# Altium PCB demo_dermis_main_testboard_scratch.PcbDoc (part 1 of 7)
Units mm, origin at the board's own origin, x right, y up, seen from the top; angles counter-clockwise.
Board outline 348.67 x 247.5 mm, 4 copper layers (Top Layer, Layer 1, Layer 2, Bottom Layer), stack 0.603 mm thick; 416 components, 288 nets, 1934 pads, 1690 vias.
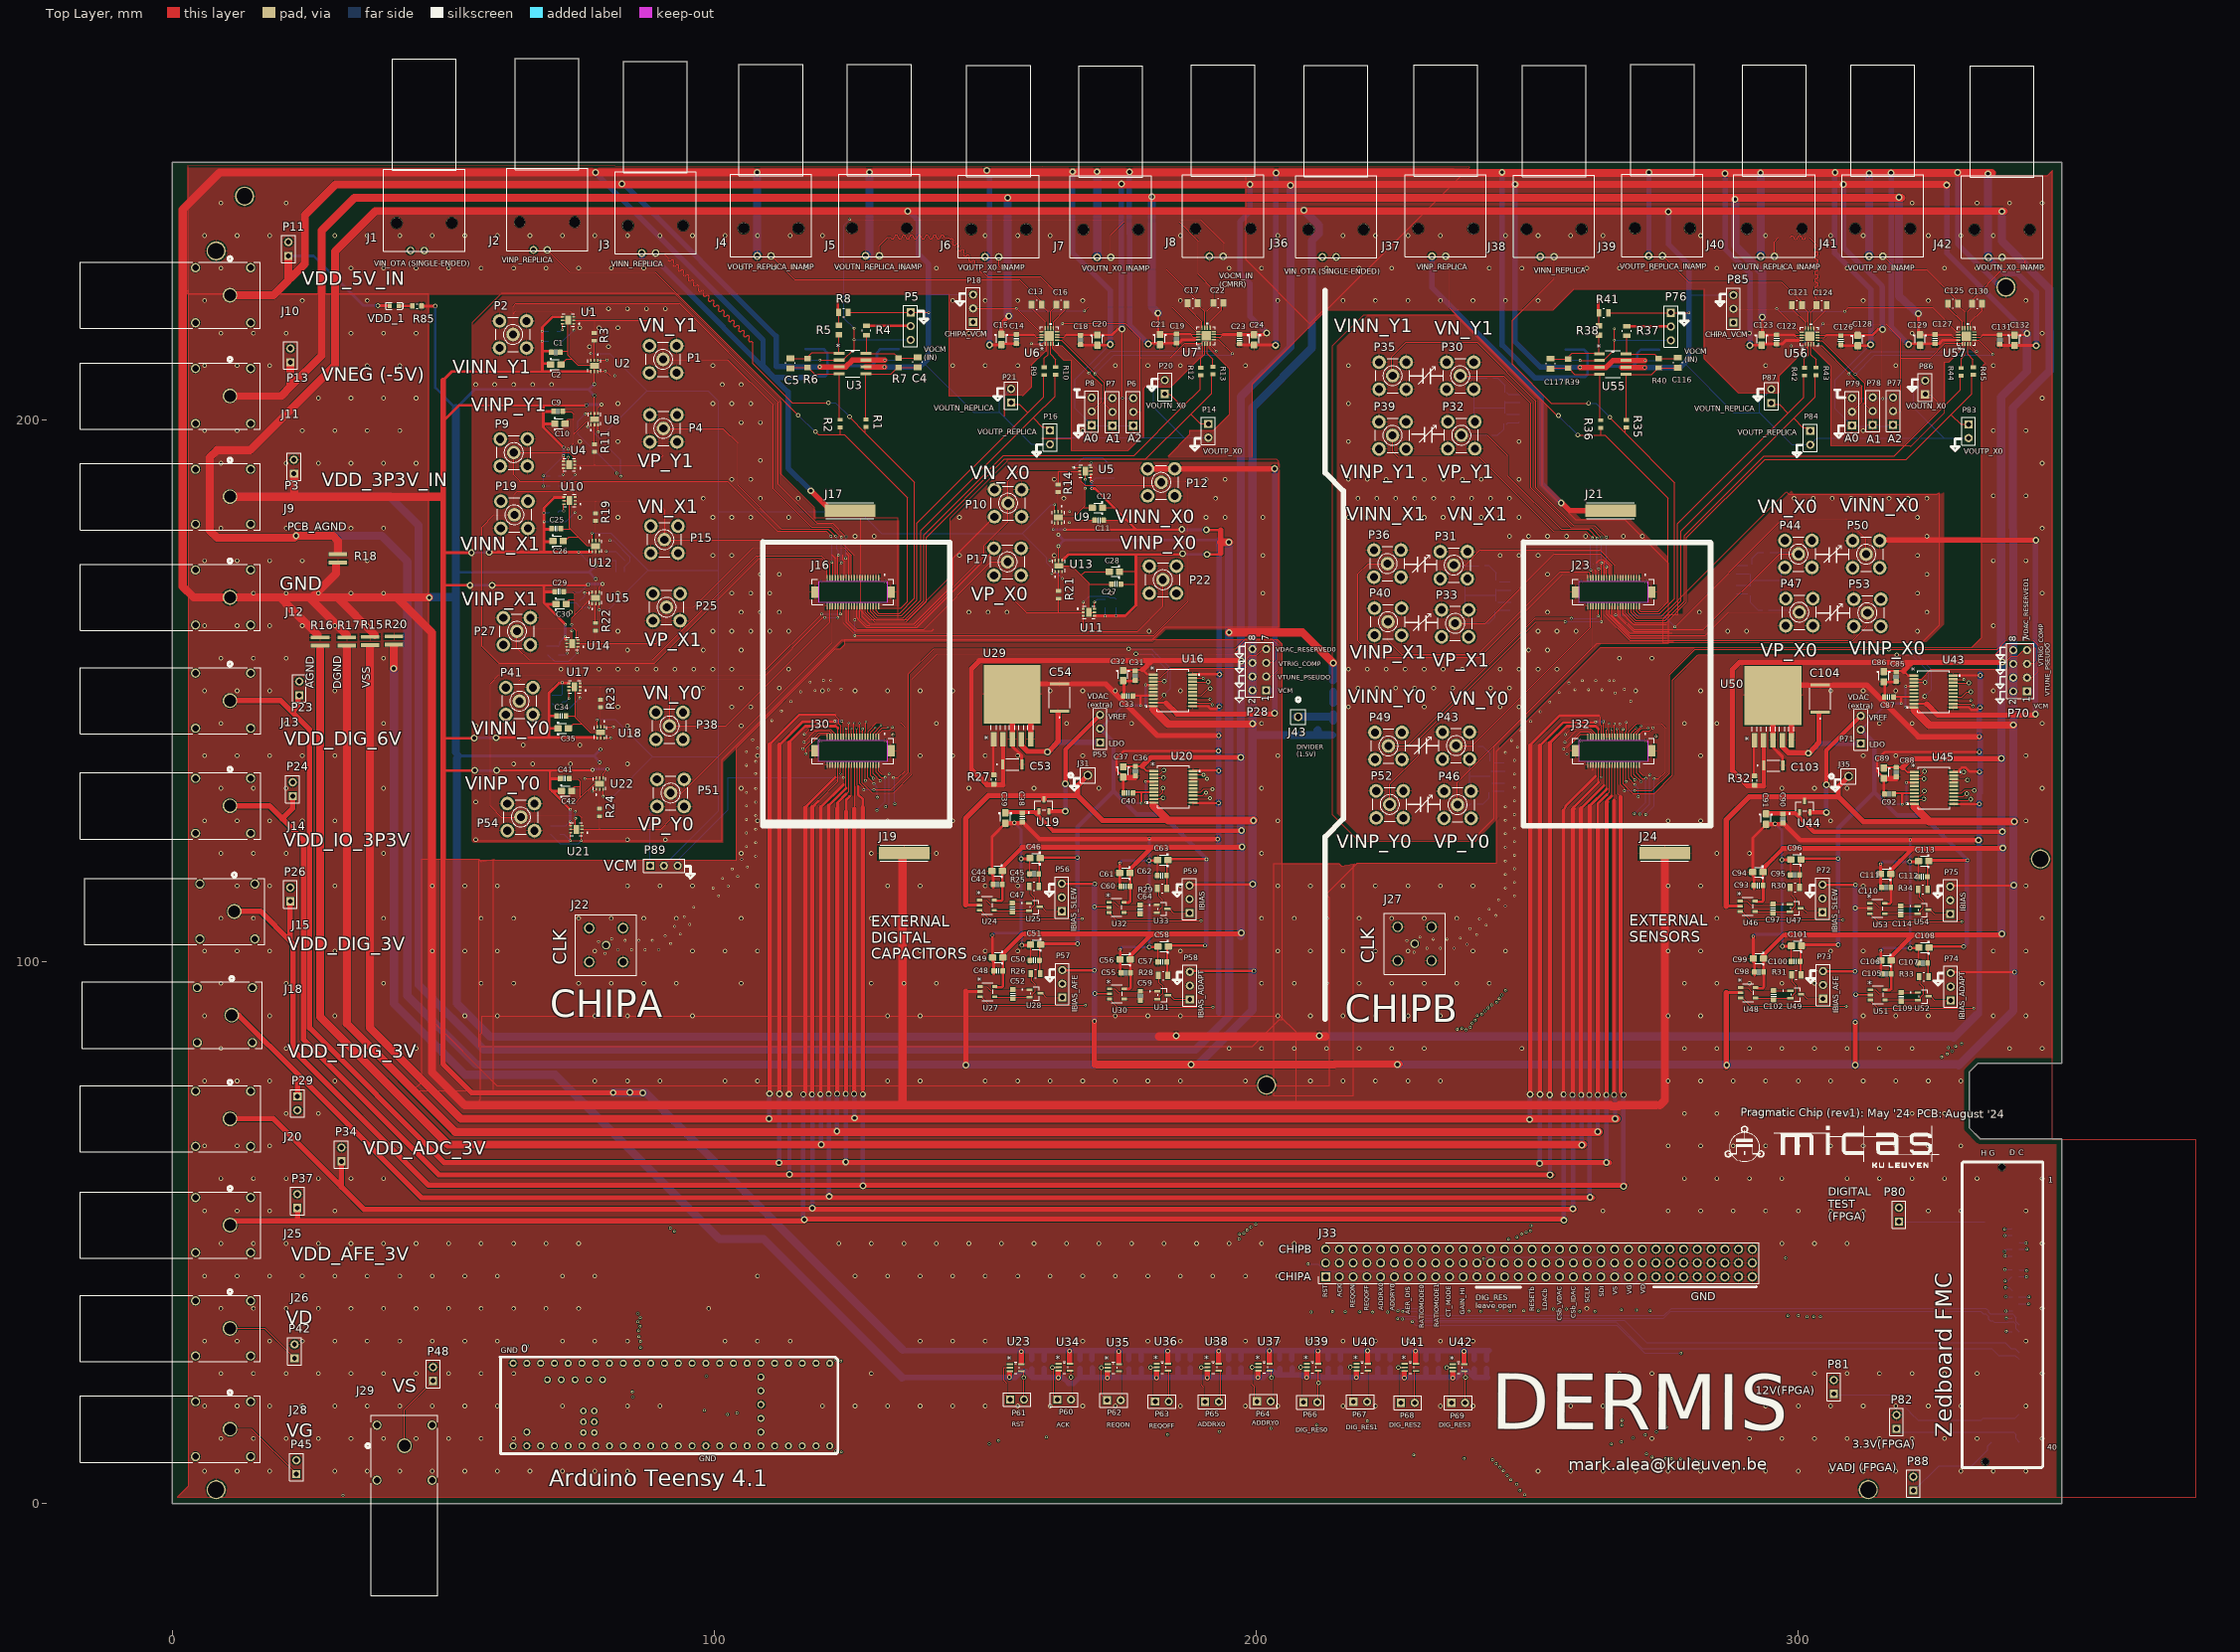
[diagram p0: Top Layer view]
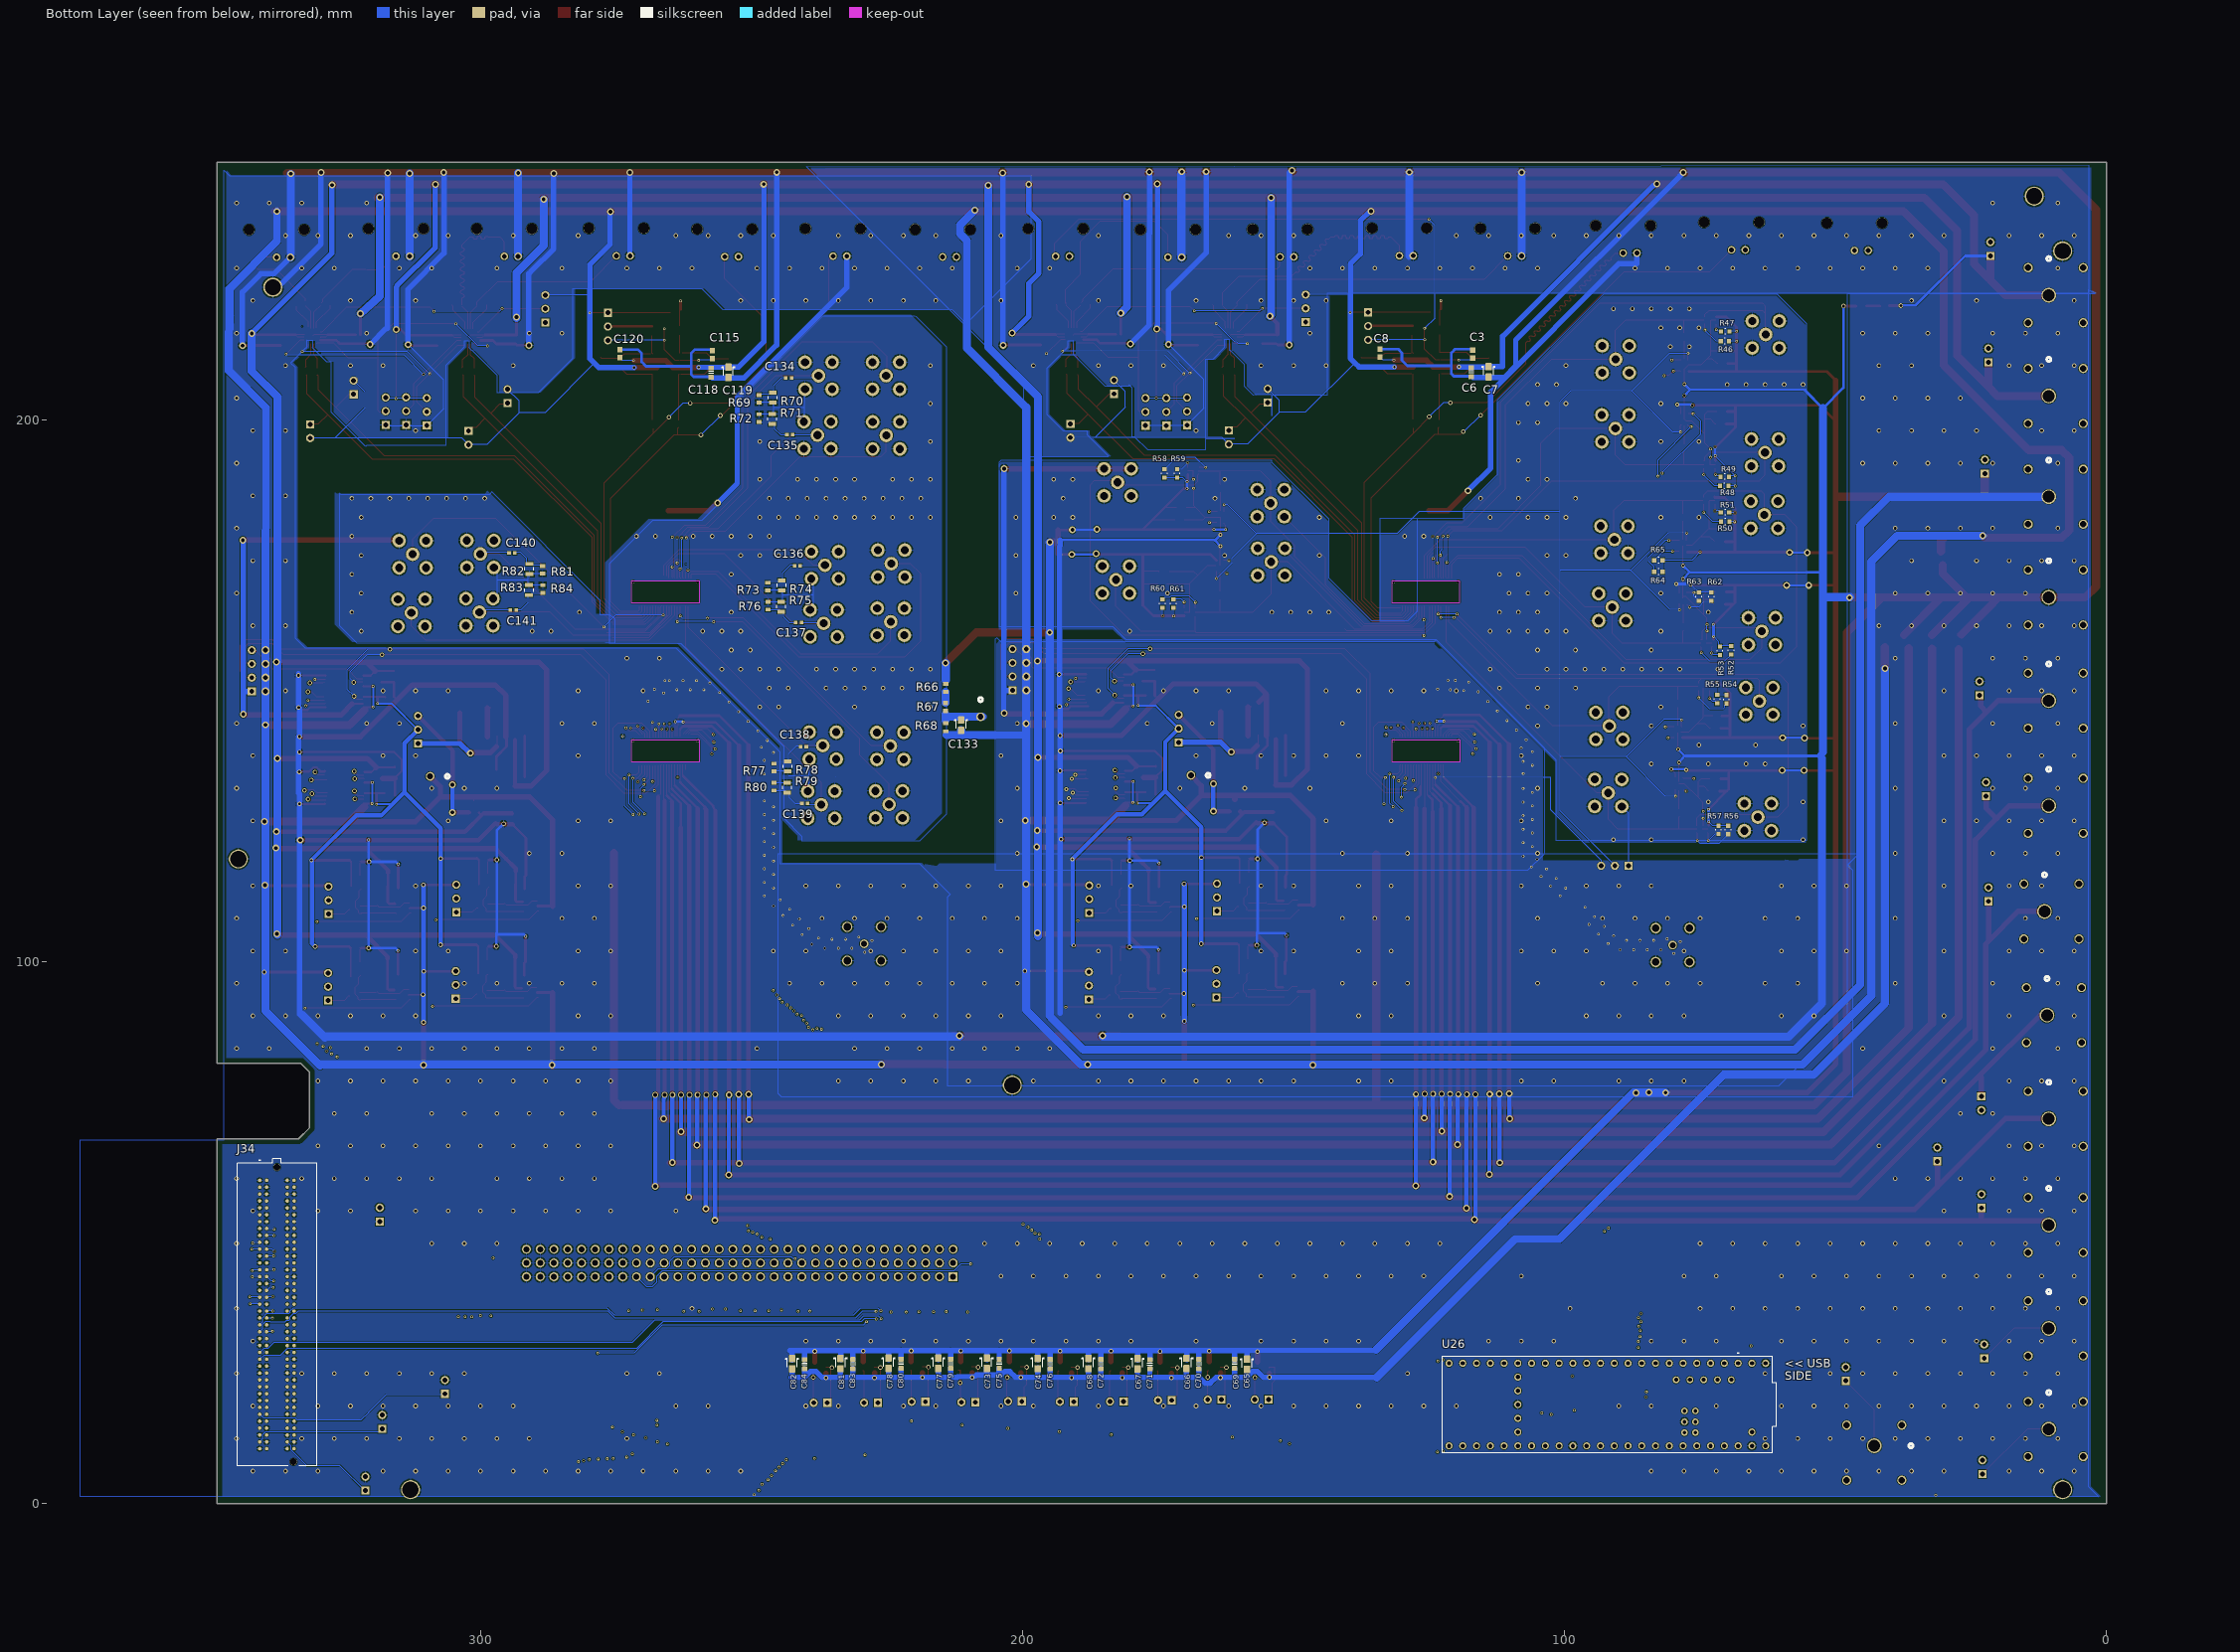
[diagram p1: Bottom Layer view, seen from below]
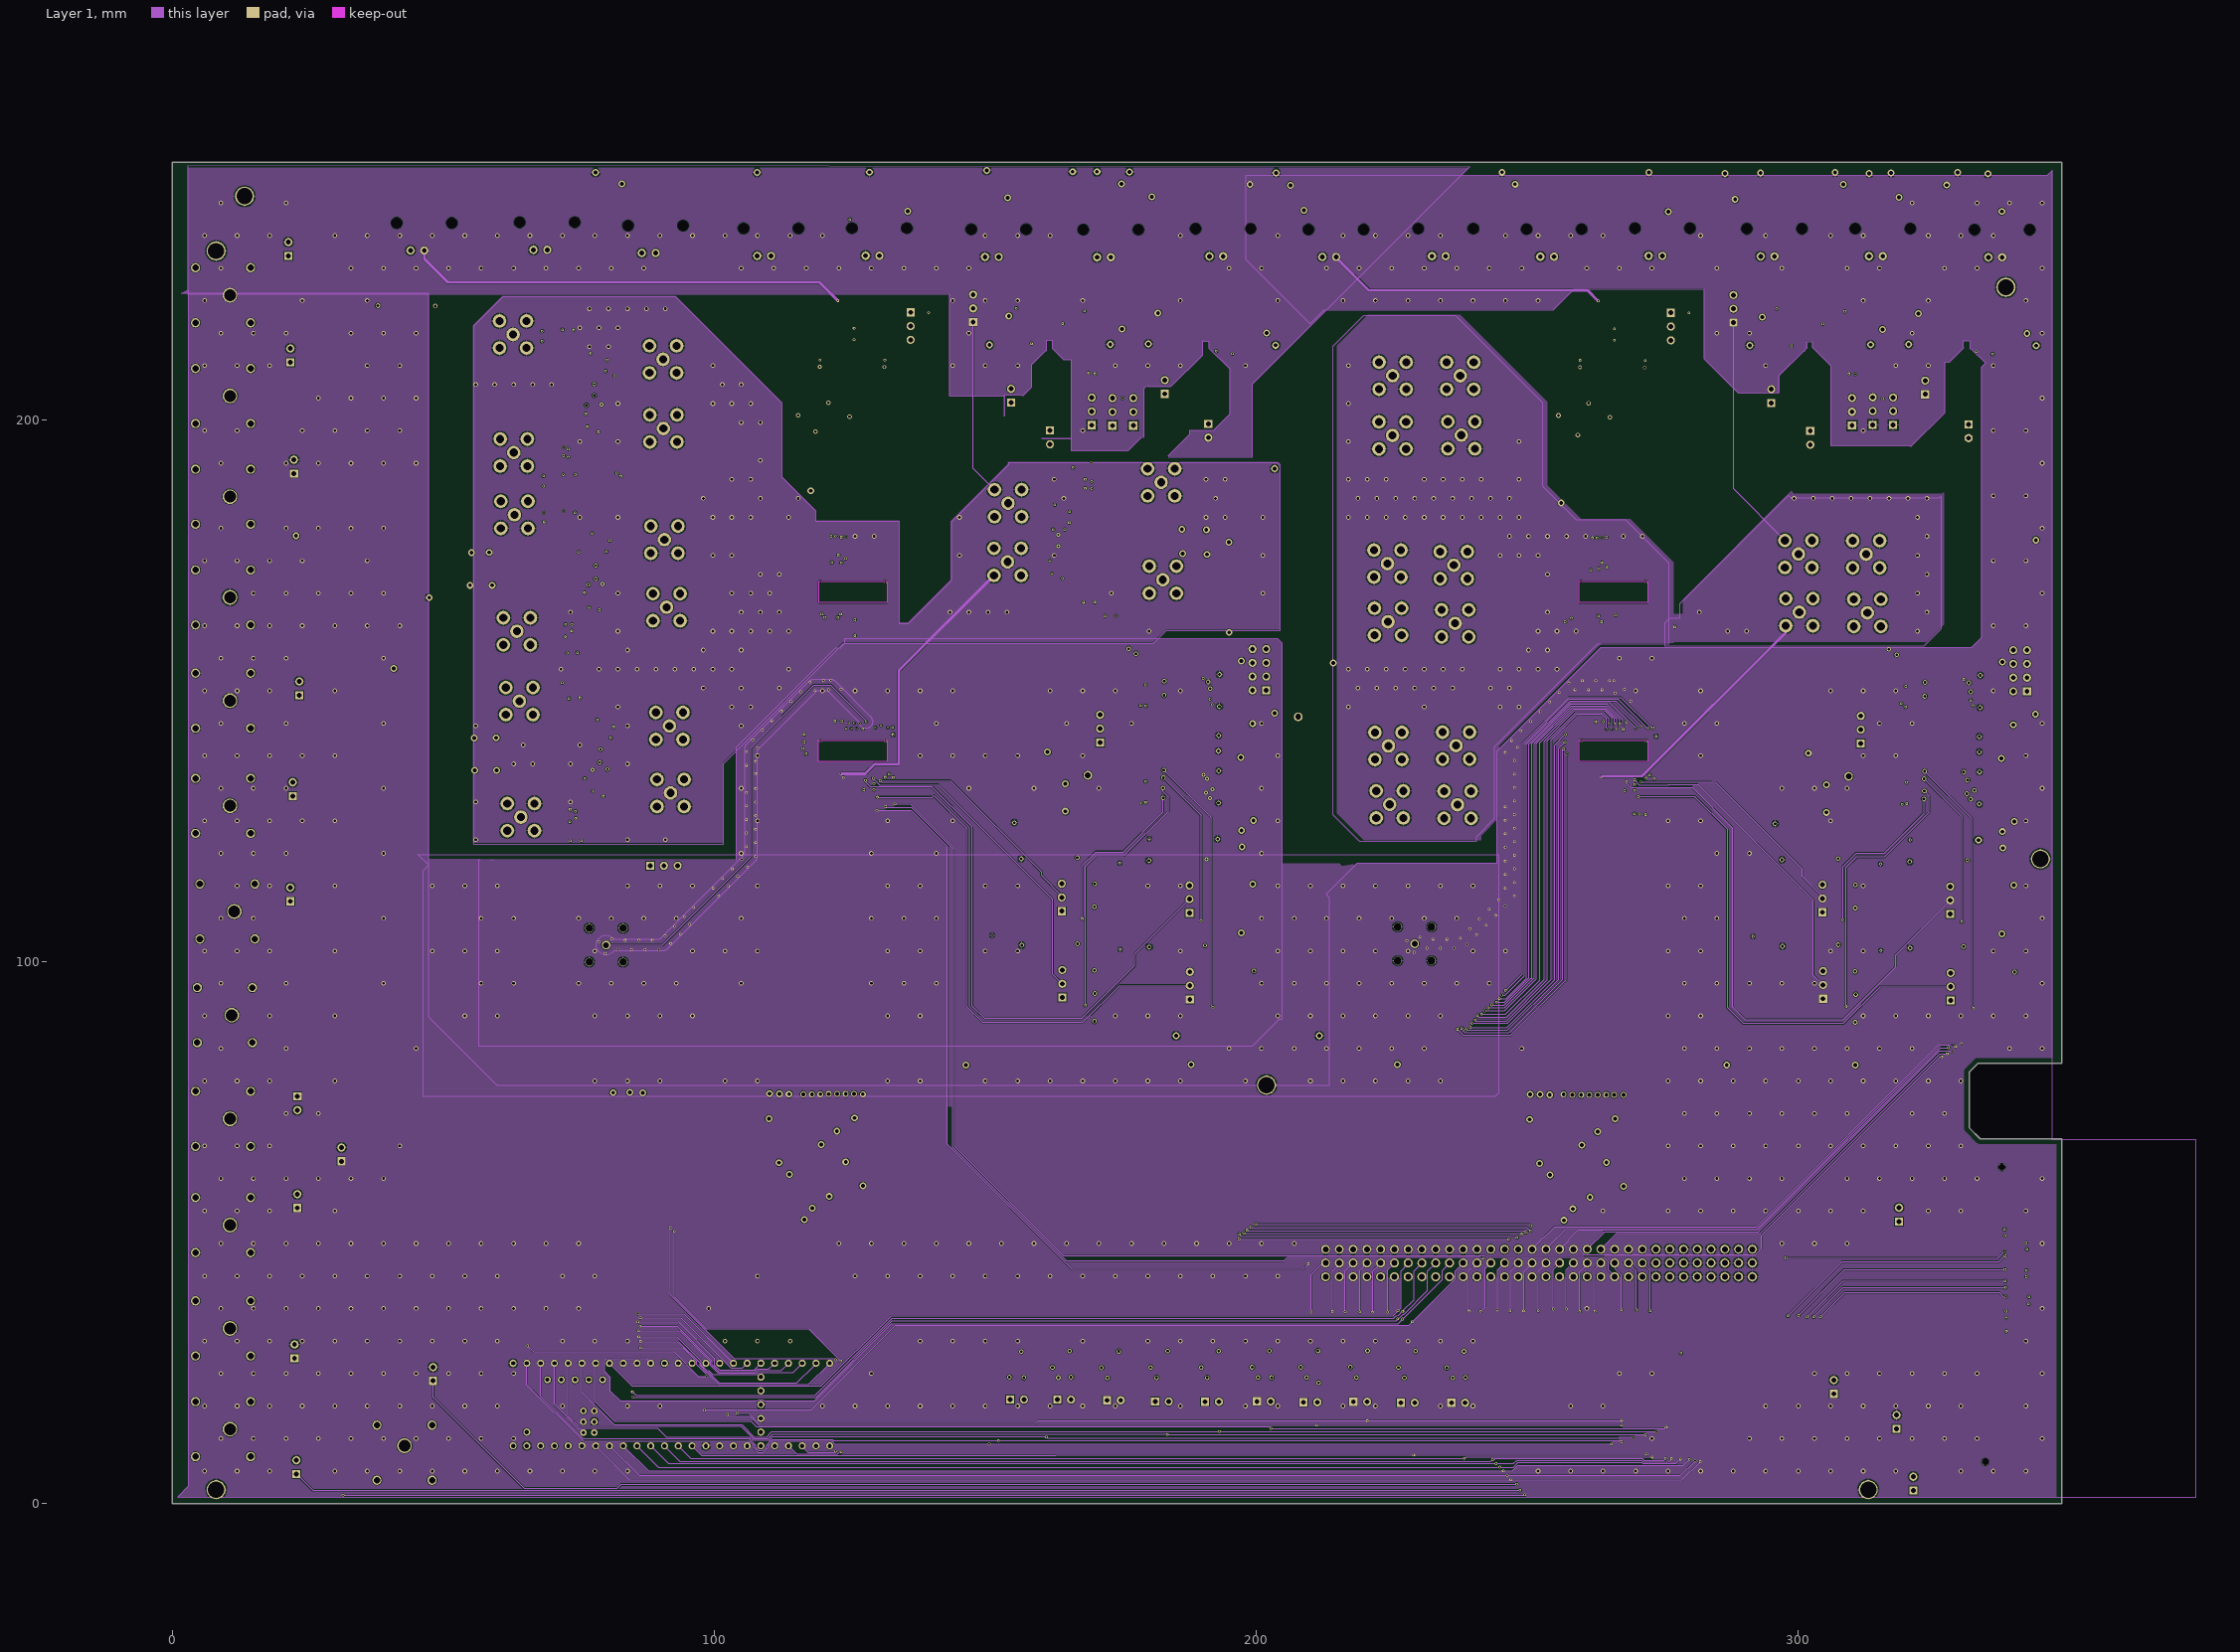
[diagram p2: Layer 1]
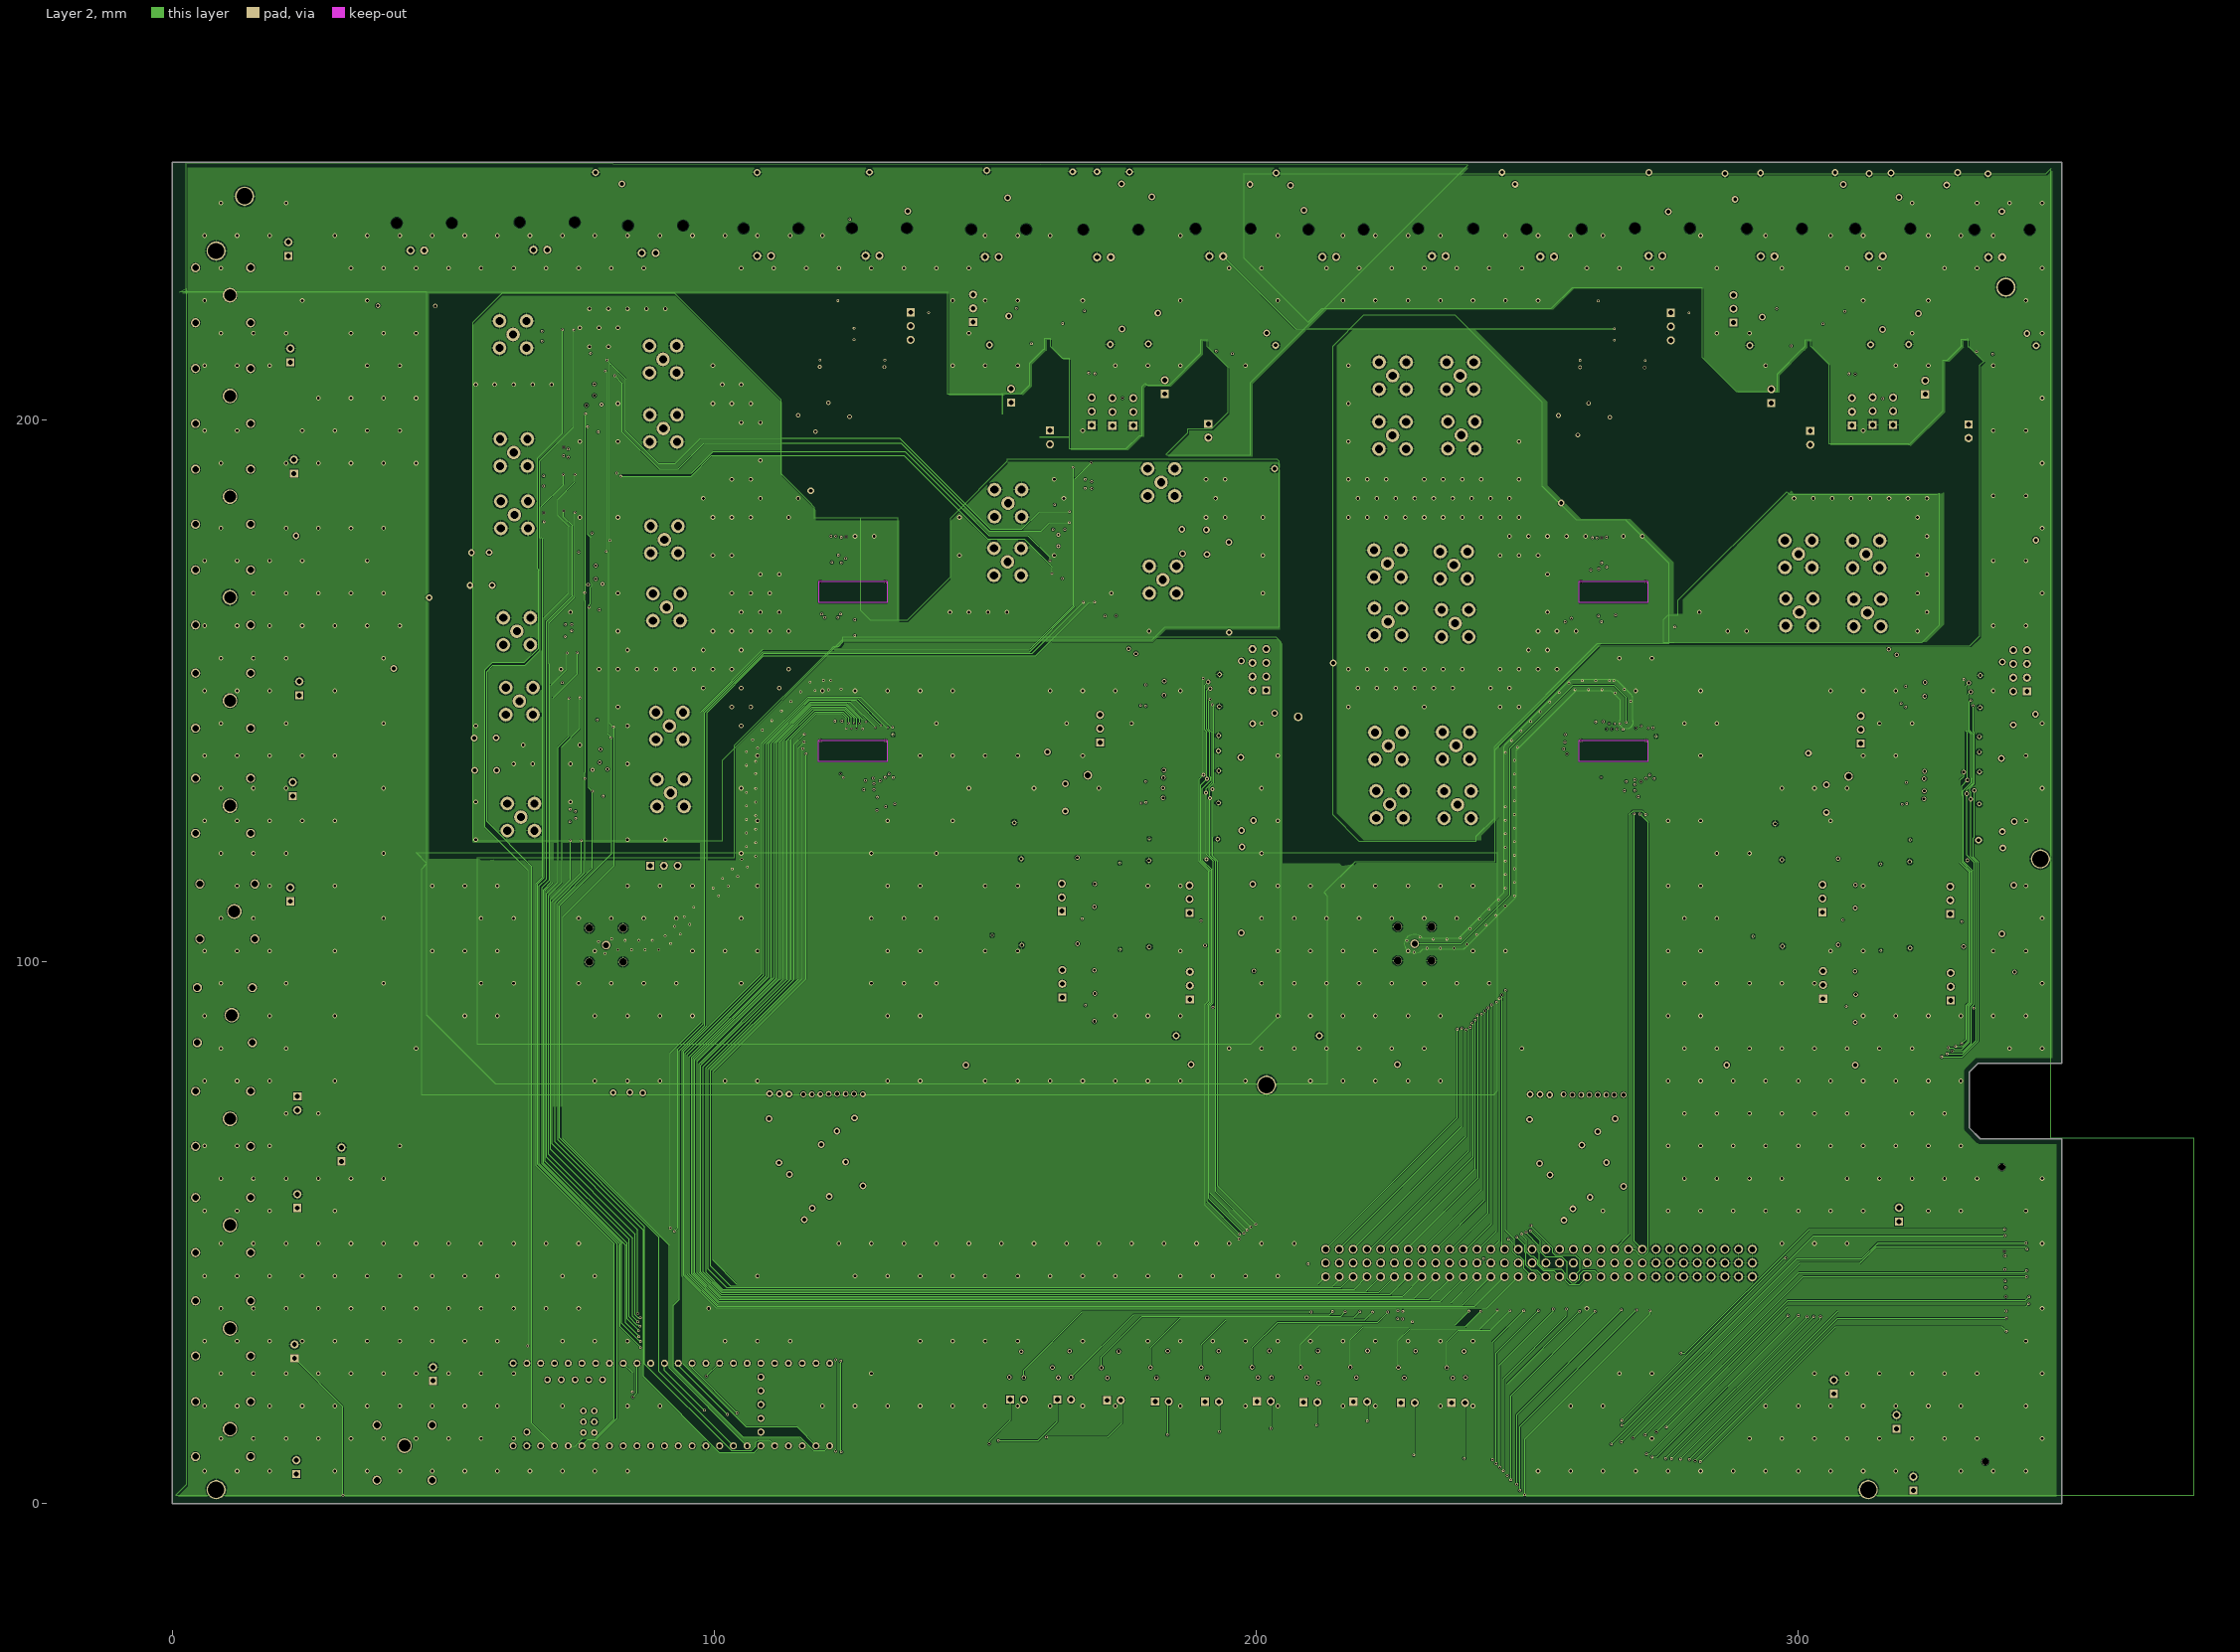
[diagram p3: Layer 2]
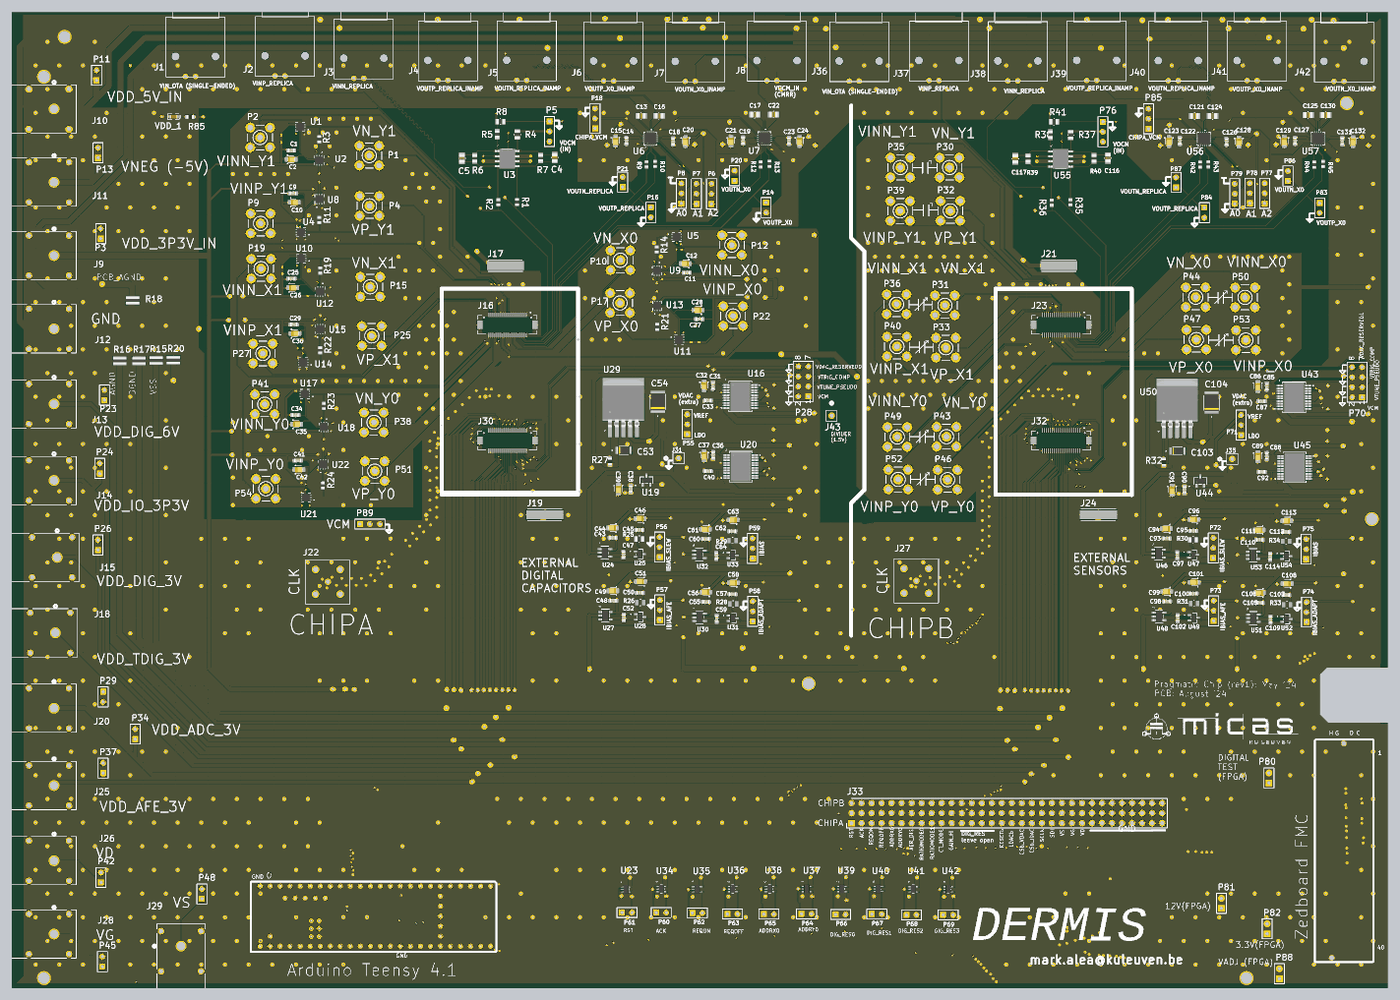
[diagram p9: 3D render of the assembled board from above, using the file's embedded part models]
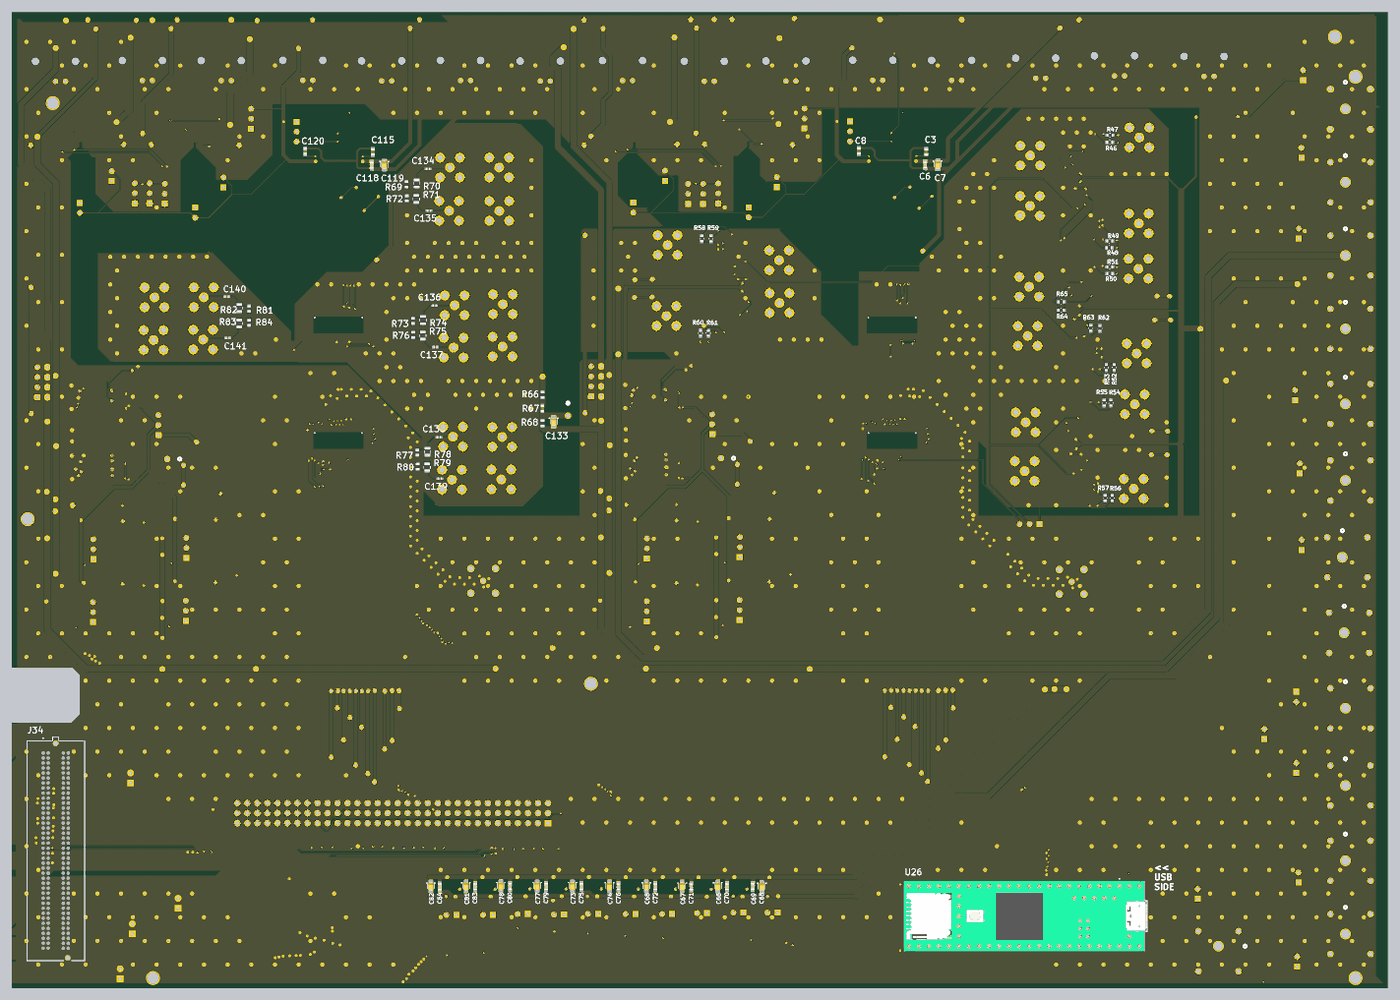
[diagram p10: 3D render of the assembled board from below, using the file's embedded part models]

## Layer stack, top to bottom
Top Solder: solder mask 0.0102, Solder Resist, Dk 3.5
Top Layer: signal copper 0.0356
Dielectric 2: prepreg 0.0711, PP-006, Dk 4.1
Layer 1: signal copper 0.035
Dielectric 1: dielectric 0.32, FR-4, Dk 4.8
Layer 2: signal copper 0.035
Dielectric 3: prepreg 0.0711, PP-006, Dk 4.1
Bottom Layer: signal copper 0.0356
Bottom Solder: solder mask 0.0102, Solder Resist, Dk 3.5

## Board outline
331.542,79.589 333.2,81.247 348.668,81.247 348.668,89.263 348.667,247.502 0,247.502 0,0 348.667,0 348.668,67.317 333.607,67.317 331.542,69.382

## Design rules (kind name [scope] priority, off if disabled: settings)
BoardOutlineClearance [All] p1: gap=1 ignorepadtopadclearanceinfootprint=FALSE except(0: Arc-SplitContinuation Track-SplitContinuation SMDPad-SplitContinuation THPad-SplitContinuation Via-SplitContinuation Fill-SplitContinuation Poly-SplitContinuation Region-SplitContinuation Text-SplitContinuation)
Clearance "Stitching GND" [IsStitchingVia and InNet('GND') vs (IsVia and (Not IsStitchingVia)) Or IsPad] p1: gap=0.254 ignorepadtopadclearanceinfootprint=FALSE
Clearance [All] p2: gap=0.1 ignorepadtopadclearanceinfootprint=FALSE except(0: Arc-Hole Track-Hole SMDPad-Hole THPad-Hole Via-Hole Fill-Hole Poly-Hole Region-Hole Text-Hole; 0.15: Arc-Text Track-Text SMDPad-Text THPad-Text Via-Text Fill-Text Poly-Text Region-Text Text-Text; 0.2: Arc-Via Track-Via SMDPad-Via THPad-Via Via-Via)
HoleSize [All] p1: absolutevalues=TRUE maxlimit=6 minlimit=0.2 maxpercent=80.000 minpercent=20.000
HoleToHoleClearance [All] p1: gap=0.25 allowstackedmicrovias=TRUE
MinimumSolderMaskSliver [All] p1: minsoldermaskwidth=0.1
PolygonConnect [All] p1: connectstyle=Relief reliefconductorwidth=0.254 reliefentries=4 polygonreliefangle="90 Angle" airgapwidth=0.254
RoutingVias [All] p1: holewidth=0.711 width=1.27 viastyle="Through Hole" minholewidth=0.075 minwidth=0.2 maxholewidth=0.711 maxwidth=2
SilkToSilkClearance [All] p1: silktosilkclearance=0.15
SilkToSolderMaskClearance [IsPad] p1: minsilkscreentomaskgap=0.15 clearancetoexposedcopper=TRUE
SolderMaskExpansion [All] p1: expansion=0.102
UnpouredPolygon UnpouredPolygon_1 [All] p1:
Width [All] p1: maxlimit=6 minlimit=0.1 preferedwidth=0.254 checkconnectedcopper=TRUE
24 further rules are at their usual default settings.

## Classes and differential pairs
component class dermis_main_testboard_extra: C133 C134 C135 C136 C137 C138 C139 C140 C141 J43 R46 R47 R48 R49 R50 R51 R52 R53 R54 R55 R56 R57 R58 R59 R60 R61 R62 R63 R64 R65 R66 R67 R68 R69 R70 R71 R72 R73 R74 R75 R76 R77 R78 R79 R80 R81 R82 R83 R84
component class dermis_main_testboard: C1 C2 C3 C4 C5 C6 C7 C8 C9 C10 C11 C12 C13 C14 C15 C16 C17 C18 C19 C20 C21 C22 C23 C24 C25 C26 C27 C28 C29 C30 C31 C32 C33 C34 C35 C36 C37 C38 C39 C40 C41 C42 C43 C44 C45 C46 C47 C48 C49 C50 C51 C52 C53 C54 C55 C56 C57 C58 C59 C60 C61 C62 C63 C64 C65 C66 C67 C68 C69 C70 C71 C72 C73 C74 C75 C76 C77 C78 C79 C80 C81 C82 C83 C84 C85 C86 C87 C88 C89 C90 C91 C92 C93 C94 C95 C96 C97 C98 C99 C100 C101 C102 C103 C104 C105 C106 C107 C108 C109 C110 C111 C112 C113 C114 C115 C116 C117 C118 C119 C120 C121 C122 C123 C124 C125 C126 C127 C128 C129 C130 C131 C132 J1 J2 J3 J4 J5 J6 J7 J8 J9 J10 J11 J12 J13 J14 J15 J16 J17 J18 J19 J20 J21 J22 J23 J24 J25 J26 J27 J28 J29 J30 J31 J32 J33 J34 J35 J36 J37 J38 J39 J40 J41 J42 P1 P2 P3 P4 P5 P6 P7 P8 P9 P10 P11 P12 P13 P14 P15 P16 P17 P18 P19 P20 P21 P22 P23 P24 P25 P26 P27 P28 P29 P30 P31 P32 P33 P34 P35 P36 P37 P38 P39 P40 P41 P42 P43 P44 P45 P46 P47 P48 P49 P50 P51 P52 P53 P54 P55 P56 P57 P58 P59 P60 P61 P62 P63 P64 P65 P66 P67 P68 P69 P70 P71 P72 P73 P74 P75 P76 P77 P78 P79 P80 P81 P82 P83 P84 P85 P86 P87 P88 P89 R1 R2 R3 R4 R5 R6 R7 R8 R9 R10 R11 R12 R13 R14 R15 R16 R17 R18 R19 R20 R21 R22 R23 R24 R25 R26 R27 R28 R29 R30 R31 R32 R33 R34 R35 R36 R37 R38 R39 R40 R41 R42 R43 R44 R45 R85 U1 U2 U3 U4 U5 U6 U7 U8 U9 U10 U11 U12 U13 U14 U15 U16 U17 U18 U19 U20 U21 U22 U23 U24 U25 U26 U27 U28 U29 U30 U31 U32 U33 U34 U35 U36 U37 U38 U39 U40 U41 U42 U43 U44 U45 U46 U47 U48 U49 U50 U51 U52 U53 U54 U55 U56 U57 VDD_1

## Components (designator, comment, footprint, x,y, rotation, side; value= is the part's Value field where it differs from the comment)
C1 "approved sub OK" CAPC1608N 70.786,212.455 r0 top value=100n
C2 "10µ" CAPMP2012X150USR 70.785,210.191 r0 top
C3 "C0603C221K5RACTU" CAPC17595_87N_KEM 116.943,212.149 r90 bottom
C4 "CML0805C0G150JT50V" CAP_CML_0805_.3pF-1500pF,4700pF_STP 137.544,210.631 r270 top value=15p
C5 "CML0805C0G150JT50V" CAP_CML_0805_.3pF-1500pF,4700pF_STP 114.064,210.445 r270 top value=15p
C6 "approved sub OK" CAPC1608N 117.207,208.784 r270 bottom value=100n
C7 "10µ" CAPMP2012X150USR 114.018,208.856 r270 bottom
C8 "C0603C221K5RACTU" CAPC17595_87N_KEM 134.037,212.319 r90 bottom
C9 "approved sub OK" CAPC1608N 71.221,201.601 r0 top value=100n
C10 "10µ" CAPMP2012X150USR 71.55,199.305 r0 top
C11 "approved sub OK" CAPC1608N 171.034,181.454 r180 top value=100n
C12 "10µ" CAPMP2012X150USR 170.704,183.75 r180 top
C13 "CML0805C0G3R0CT50V" CAP_CML_0805_.3pF-1500pF,4700pF_STP 159.491,221.265 r180 top value=3p
C14 "approved sub OK" CAPC1608N 155.754,214.924 r270 top value=100n
C15 "10µ" CAPMP2012X150USR 152.994,214.812 r270 top
C16 "CML0805C0G3R0CT50V" CAP_CML_0805_.3pF-1500pF,4700pF_STP 164.034,221.241 r180 top value=3p
C17 "CML0805C0G3R0CT50V" CAP_CML_0805_.3pF-1500pF,4700pF_STP 188.277,221.545 r180 top
C18 "approved sub OK" CAPC1608N 167.586,214.748 r270 top value=100n
C19 "approved sub OK" CAPC1608N 185.312,214.995 r270 top value=100n
C20 "10µ" CAPMP2012X150USR 170.712,214.713 r270 top
C21 "10µ" CAPMP2012X150USR 182.236,214.8 r270 top
C22 "CML0805C0G3R0CT50V" CAP_CML_0805_.3pF-1500pF,4700pF_STP 193.028,221.575 r180 top
C23 "approved sub OK" CAPC1608N 196.929,214.897 r270 top value=100n
C24 "10µ" CAPMP2012X150USR 199.632,214.763 r270 top
C25 "approved sub OK" CAPC1608N 70.867,179.948 r0 top value=100n
C26 "10µ" CAPMP2012X150USR 71.196,177.652 r0 top
C27 "approved sub OK" CAPC1608N 174.171,169.691 r180 top value=100n
C28 "10µ" CAPMP2012X150USR 173.842,171.987 r180 top
C29 "approved sub OK" CAPC1608N 71.42,168.323 r0 top value=100n
C30 "10µ" CAPMP2012X150USR 71.75,166.027 r0 top
C31 "approved sub OK" CAPC1608N 177.698,152.772 r270 top value=100n
C32 "10µ" CAPMP2012X150USR 175.434,152.796 r270 top
C33 "approved sub OK" CAPC1608N 176.383,149.053 r180 top value=100n
C34 "approved sub OK" CAPC1608N 71.809,145.339 r0 top value=100n
C35 "10µ" CAPMP2012X150USR 72.138,143.044 r0 top
C36 "approved sub OK" CAPC1608N 177.717,135.183 r270 top value=100n
C37 "10µ" CAPMP2012X150USR 175.453,135.007 r270 top
C38 "approved sub OK" CAPC1608N 156.841,126.613 r270 top value=100n
C39 "10µ" CAPMP2012X150USR 153.718,126.524 r270 top
C40 "approved sub OK" CAPC1608N 176.421,131.136 r180 top value=100n
C41 "approved sub OK" CAPC1608N 72.435,133.823 r0 top value=100n
C42 "10µ" CAPMP2012X150USR 72.764,131.527 r0 top
C43 "approved sub OK" CAPC1608N 152.298,114.247 r180 top value=100n
C44 "10µ" CAPMP2012X150USR 152.204,116.724 r180 top
C45 "approved sub OK" CAPC1608N 159.029,116.22 r180 top value=100n
C46 "10µ" CAPMP2012X150USR 159.213,119.087 r180 top
C47 "47p" CAPC1608N 155.004,109.975 r90 top
C48 "approved sub OK" CAPC1608N 152.399,98.296 r180 top value=100n
C49 "10µ" CAPMP2012X150USR 152.305,100.773 r180 top
C50 "approved sub OK" CAPC1608N 159.13,100.269 r180 top value=100n
C51 "10µ" CAPMP2012X150USR 159.314,103.136 r180 top
C52 "47p" CAPC1608N 155.105,94.023 r90 top
C53 "C3216X5R1A686M160AC" CAP_3216_TDK 155.041,136.409 r0 top
C54 "C4532X7R1C336M250KC" CAP_4532_TDK 163.711,148.729 r90 top
C55 "approved sub OK" CAPC1608N 175.929,97.962 r180 top value=100n
C56 "10µ" CAPMP2012X150USR 175.835,100.439 r180 top
C57 "approved sub OK" CAPC1608N 182.66,99.935 r180 top value=100n
C58 "10µ" CAPMP2012X150USR 182.844,102.802 r180 top
C59 "47p" CAPC1608N 178.635,93.69 r90 top
C60 "approved sub OK" CAPC1608N 175.864,113.912 r180 top value=100n
C61 "10µ" CAPMP2012X150USR 175.77,116.389 r180 top
C62 "approved sub OK" CAPC1608N 182.595,115.885 r180 top value=100n
C63 "10µ" CAPMP2012X150USR 182.778,118.752 r180 top
C64 "47p" CAPC1608N 178.57,109.639 r90 top
C65 "10µ" CAPMP2012X150USR 158.601,25.715 r270 bottom
C66 "10µ" CAPMP2012X150USR 169.747,25.852 r270 bottom
C67 "10µ" CAPMP2012X150USR 178.8,25.798 r270 bottom
C68 "10µ" CAPMP2012X150USR 187.86,25.847 r270 bottom
C69 "approved sub OK" CAPC1608N 160.889,25.807 r270 bottom value=100n
C70 "approved sub OK" CAPC1608N 167.458,25.759 r270 bottom value=100n
C71 "approved sub OK" CAPC1608N 176.512,25.705 r270 bottom value=100n
C72 "approved sub OK" CAPC1608N 185.571,25.755 r270 bottom value=100n
C73 "10µ" CAPMP2012X150USR 206.602,25.892 r270 bottom
C74 "10µ" CAPMP2012X150USR 197.229,25.847 r270 bottom
C75 "approved sub OK" CAPC1608N 204.313,25.8 r270 bottom value=100n
C76 "approved sub OK" CAPC1608N 194.941,25.755 r270 bottom value=100n
C77 "10µ" CAPMP2012X150USR 215.563,25.887 r270 bottom
C78 "10µ" CAPMP2012X150USR 224.732,25.897 r270 bottom
C79 "approved sub OK" CAPC1608N 213.275,25.794 r270 bottom value=100n
C80 "approved sub OK" CAPC1608N 222.444,25.805 r270 bottom value=100n
C81 "10µ" CAPMP2012X150USR 233.58,25.836 r270 bottom
C82 "10µ" CAPMP2012X150USR 242.509,25.807 r270 bottom
C83 "approved sub OK" CAPC1608N 231.291,25.744 r270 bottom value=100n
C84 "approved sub OK" CAPC1608N 240.22,25.714 r270 bottom value=100n
C85 "approved sub OK" CAPC1608N 318.058,152.571 r270 top value=100n
C86 "10µ" CAPMP2012X150USR 315.794,152.595 r270 top
C87 "approved sub OK" CAPC1608N 316.744,148.852 r180 top value=100n
C88 "approved sub OK" CAPC1608N 318.077,134.982 r270 top value=100n
C89 "10µ" CAPMP2012X150USR 315.813,134.806 r270 top
C90 "approved sub OK" CAPC1608N 297.201,126.412 r270 top value=100n
C91 "10µ" CAPMP2012X150USR 294.078,126.323 r270 top
C92 "approved sub OK" CAPC1608N 316.781,130.935 r180 top value=100n
C93 "approved sub OK" CAPC1608N 292.659,114.046 r180 top value=100n
C94 "10µ" CAPMP2012X150USR 292.565,116.523 r180 top
C95 "approved sub OK" CAPC1608N 299.39,116.019 r180 top value=100n
C96 "10µ" CAPMP2012X150USR 299.573,118.886 r180 top
C97 "47p" CAPC1608N 295.365,109.774 r90 top
C98 "approved sub OK" CAPC1608N 292.76,98.095 r180 top value=100n
C99 "10µ" CAPMP2012X150USR 292.666,100.572 r180 top
C100 "approved sub OK" CAPC1608N 299.491,100.068 r180 top value=100n
C101 "10µ" CAPMP2012X150USR 299.674,102.935 r180 top
C102 "47p" CAPC1608N 295.466,93.822 r90 top
C103 "C3216X5R1A686M160AC" CAP_3216_TDK 295.401,136.207 r0 top
C104 "C4532X7R1C336M250KC" CAP_4532_TDK 304.072,148.528 r90 top
C105 "approved sub OK" CAPC1608N 316.29,97.761 r180 top value=100n
C106 "10µ" CAPMP2012X150USR 316.196,100.238 r180 top
C107 "approved sub OK" CAPC1608N 323.021,99.734 r180 top value=100n
C108 "10µ" CAPMP2012X150USR 323.204,102.601 r180 top
C109 "47p" CAPC1608N 318.996,93.489 r90 top
C110 "approved sub OK" CAPC1608N 316.224,113.711 r180 top value=100n
C111 "10µ" CAPMP2012X150USR 316.13,116.188 r180 top
C112 "approved sub OK" CAPC1608N 322.955,115.684 r180 top value=100n
C113 "10µ" CAPMP2012X150USR 323.139,118.551 r180 top
C114 "47p" CAPC1608N 318.93,109.438 r90 top
C115 "C0603C221K5RACTU" CAPC17595_87N_KEM 257.216,212.07 r90 bottom
C116 "CML0805C0G150JT50V" CAP_CML_0805_.3pF-1500pF,4700pF_STP 277.816,210.552 r270 top
C117 "CML0805C0G150JT50V" CAP_CML_0805_.3pF-1500pF,4700pF_STP 254.336,210.366 r270 top
C118 "approved sub OK" CAPC1608N 257.48,208.705 r270 bottom value=100n
C119 "10µ" CAPMP2012X150USR 254.29,208.777 r270 bottom
C120 "C0603C221K5RACTU" CAPC17595_87N_KEM 274.309,212.241 r90 bottom
C121 "CML0805C0G3R0CT50V" CAP_CML_0805_.3pF-1500pF,4700pF_STP 299.764,221.186 r180 top
C122 "approved sub OK" CAPC1608N 296.026,214.845 r270 top value=100n
C123 "10µ" CAPMP2012X150USR 293.267,214.733 r270 top
C124 "CML0805C0G3R0CT50V" CAP_CML_0805_.3pF-1500pF,4700pF_STP 304.306,221.162 r180 top
C125 "CML0805C0G3R0CT50V" CAP_CML_0805_.3pF-1500pF,4700pF_STP 328.55,221.466 r180 top
C126 "approved sub OK" CAPC1608N 307.858,214.669 r270 top value=100n
C127 "approved sub OK" CAPC1608N 325.236,214.896 r270 top value=100n
C128 "10µ" CAPMP2012X150USR 310.984,214.634 r270 top
C129 "10µ" CAPMP2012X150USR 322.508,214.721 r270 top
C130 "CML0805C0G3R0CT50V" CAP_CML_0805_.3pF-1500pF,4700pF_STP 333.005,221.447 r180 top
C131 "approved sub OK" CAPC1608N 337.201,214.818 r270 top value=100n
C132 "10µ" CAPMP2012X150USR 339.904,214.685 r270 top
C133 "10µ" CAPMP2012X150USR 211.36,143.646 r270 bottom
C134 "0402YJ100FBSTR" CAP_0402_AVX 243.178,207.738 r180 bottom value=10p
C135 "0402YJ100FBSTR" CAP_0402_AVX 242.942,197.239 r180 bottom value=10p
C136 "0402YJ100FBSTR" CAP_0402_AVX 241.547,173.091 r180 bottom value=10p
C137 "0402YJ100FBSTR" CAP_0402_AVX 241.311,162.591 r180 bottom value=10p
C138 "0402YJ100FBSTR" CAP_0402_AVX 240.43,139.705 r180 bottom value=10p
C139 "0402YJ100FBSTR" CAP_0402_AVX 240.194,129.205 r180 bottom value=10p
C140 "0402YJ100FBSTR" CAP_0402_AVX 294.221,175.418 r0 bottom value=10p
C141 "0402YJ100FBSTR" CAP_0402_AVX 293.985,164.918 r0 bottom value=10p
J1 "CONBNC002" CONN_CONBN_LNX 46.515,238.696 r0 top
J2 "CONBNC002" CONN_CONBN_LNX 69.207,238.824 r0 top
J3 "CONBNC002" CONN_CONBN_LNX 89.198,238.232 r0 top
J4 "CONBNC002" CONN_CONBN_LNX 110.492,237.7 r0 top
J5 "CONBNC002" CONN_CONBN_LNX 130.483,237.727 r0 top
J6 "CONBNC002" CONN_CONBN_LNX 152.501,237.522 r0 top
J7 "CONBNC002" CONN_CONBN_LNX 173.184,237.458 r0 top
J8 "CONBNC002" CONN_CONBN_LNX 193.905,237.629 r0 top
J9 "FCR7350R" CONN1_FCR7350R_CLF 10.67,185.809 r270 top
J10 "FCR7350R" CONN1_FCR7350R_CLF 10.67,222.987 r270 top
J11 "FCR7350R" CONN1_FCR7350R_CLF 10.67,204.398 r270 top
J12 "FCR7350R" CONN1_FCR7350R_CLF 10.67,167.22 r270 top
J13 "FCR7350R" CONN1_FCR7350R_CLF 10.674,148.175 r270 top
J14 "FCR7350R" CONN1_FCR7350R_CLF 10.674,128.764 r270 top
J15 "FCR7350R" CONN1_FCR7350R_CLF 11.469,109.271 r270 top
J16 "DF17(4.0)-40DP-0.5V(57)" HRS_DF17(4.0)-40DP-0.5V(57) 125.596,168.224 r180 top locked
J17 "S1711-46R" HARWIN_S1711-46R 125.062,183.253 r180 top
J18 "FCR7350R" CONN1_FCR7350R_CLF 11.003,90.135 r270 top
J19 "S1711-46R" HARWIN_S1711-46R 135.062,120.052 r180 top
J20 "FCR7350R" CONN1_FCR7350R_CLF 10.674,71 r270 top
J21 "S1711-46R" HARWIN_S1711-46R 265.386,183.253 r180 top
J22 "VB335-75" CONN5_VB335_CIN 80.069,103.068 r0 top
J23 "DF17(4.0)-40DP-0.5V(57)" HRS_DF17(4.0)-40DP-0.5V(57) 265.92,168.224 r180 top locked
J24 "S1711-46R" HARWIN_S1711-46R 275.386,120.052 r180 top
J25 "FCR7350R" CONN1_FCR7350R_CLF 10.674,51.398 r270 top
J26 "FCR7350R" CONN1_FCR7350R_CLF 10.67,32.33 r270 top
J27 "VB335-75" CONN5_VB335_CIN 229.238,103.307 r270 top
J28 "FCR7350R" CONN1_FCR7350R_CLF 10.67,13.74 r270 top
J29 "FCR7350R" CONN1_FCR7350R_CLF 42.865,10.67 r0 top
J30 "DF17(4.0)-40DP-0.5V(57)" HRS_DF17(4.0)-40DP-0.5V(57) 125.595,138.905 r180 top locked
J31 "901200761" CONN_90120-0761_MOL 168.945,134.405 r0 top
J32 "DF17(4.0)-40DP-0.5V(57)" HRS_DF17(4.0)-40DP-0.5V(57) 265.919,138.905 r180 top locked
J33 "TSW-132-09-G-T" HDRV96W64P254_3X32_8128X749X838P 212.804,41.862 r0 top
J34 "ASP-127797-01" SAMTEC_ASP-127797-01 337.571,34.89 r90 bottom locked
J35 "901200761" CONN_90120-0761_MOL 309.306,134.204 r0 top
J36 "CONBNC002" CONN_CONBN_LNX 214.749,237.509 r0 top
J37 "CONBNC002" CONN_CONBN_LNX 234.966,237.661 r0 top
J38 "CONBNC002" CONN_CONBN_LNX 254.957,237.555 r0 top
J39 "CONBNC002" CONN_CONBN_LNX 274.949,237.711 r0 top
J40 "CONBNC002" CONN_CONBN_LNX 295.616,237.622 r0 top
J41 "CONBNC002" CONN_CONBN_LNX 315.607,237.648 r0 top
J42 "CONBNC002" CONN_CONBN_LNX 337.624,237.443 r0 top
J43 "901200761" CONN_90120-0761_MOL 207.754,145.193 r270 top
P1 "SMB" SMB_V-RJ45 90.571,211.162 r0 top
P2 "SMB" SMB_V-RJ45 62.893,215.748 r0 top
P3 "Header 2" HDR1X2 22.476,190.094 r90 top
P4 "SMB" SMB_V-RJ45 90.64,198.41 r0 top
P5 "Header 3" HDR1X3 136.248,219.829 r270 top
P6 "Header 3" HDR1X3 177.318,198.928 r90 top
P7 "Header 3" HDR1X3 173.467,198.922 r90 top
P8 "Header 3" HDR1X3 169.657,199.018 r90 top
P9 "SMB" SMB_V-RJ45 63.026,193.957 r0 top
P10 "SMB" SMB_V-RJ45 154.219,184.614 r180 top
P11 "Header 2" HDR1X2 21.449,230.238 r90 top
P12 "SMB" SMB_V-RJ45 182.471,188.463 r180 top
P13 "Header 2" HDR1X2 21.826,210.612 r90 top
P14 "Header 2" HDR1X2 191.166,199.249 r270 top
P15 "SMB" SMB_V-RJ45 90.82,177.884 r0 top
P16 "Header 2" HDR1X2 161.957,198.019 r270 top
P17 "SMB" SMB_V-RJ45 154.13,173.785 r180 top
P18 "Header 3" HDR1X3 147.78,218.025 r90 top
P19 "SMB" SMB_V-RJ45 63.142,182.47 r0 top
P20 "Header 2" HDR1X2 183.149,204.786 r90 top
P21 "Header 2" HDR1X2 154.775,203.175 r90 top
P22 "SMB" SMB_V-RJ45 182.785,170.485 r180 top
P23 "Header 2" HDR1X2 23.462,149.167 r90 top
P24 "Header 2" HDR1X2 22.233,130.571 r90 top
P25 "SMB" SMB_V-RJ45 91.211,165.423 r0 top
P26 "Header 2" HDR1X2 21.792,111.148 r90 top
P27 "SMB" SMB_V-RJ45 63.596,160.969 r0 top
P28 "Header 4X2" HDR2X4 201.856,150.075 r90 top
P29 "Header 2" HDR1X2 23.12,75.147 r270 top
P30 "SMB" SMB_V-RJ45 237.644,208.136 r0 top
P31 "SMB" SMB_V-RJ45 236.458,173.177 r0 top
P32 "SMB" SMB_V-RJ45 237.847,197.162 r0 top
P33 "SMB" SMB_V-RJ45 236.7,162.432 r0 top
P34 "Header 2" HDR1X2 31.223,63.169 r90 top
P35 "SMB" SMB_V-RJ45 225.176,208.141 r0 top
P36 "SMB" SMB_V-RJ45 224.22,173.463 r0 top
P37 "Header 2" HDR1X2 23.103,54.561 r90 top
P38 "SMB" SMB_V-RJ45 91.748,143.505 r0 top
P39 "SMB" SMB_V-RJ45 225.156,197.123 r0 top
P40 "SMB" SMB_V-RJ45 224.318,162.732 r0 top
P41 "SMB" SMB_V-RJ45 64.069,148.091 r0 top
P42 "Header 2" HDR1X2 22.589,26.82 r90 top
P43 "SMB" SMB_V-RJ45 236.871,139.872 r0 top
P44 "SMB" SMB_V-RJ45 300.04,175.239 r0 top
P45 "Header 2" HDR1X2 22.928,5.461 r90 top
P46 "SMB" SMB_V-RJ45 237.147,128.969 r0 top
P47 "SMB" SMB_V-RJ45 300.207,164.497 r0 top
P48 "Header 2" HDR1X2 48.149,22.651 r90 top
P49 "SMB" SMB_V-RJ45 224.4,139.813 r0 top
P50 "SMB" SMB_V-RJ45 312.538,175.198 r0 top
P51 "SMB" SMB_V-RJ45 91.956,131.136 r0 top
P52 "SMB" SMB_V-RJ45 224.641,129.023 r0 top
P53 "SMB" SMB_V-RJ45 312.755,164.38 r0 top
P54 "SMB" SMB_V-RJ45 64.341,126.682 r0 top
P55 "Header 3" HDR1X3 171.195,140.47 r90 top
P56 "Header 3" HDR1X3 164.132,109.327 r90 top
P57 "Header 3" HDR1X3 164.233,93.376 r90 top
P58 "Header 3" HDR1X3 187.763,93.042 r90 top
P59 "Header 3" HDR1X3 187.698,108.992 r90 top
P60 "Header 2" HDR1X2 163.297,19.176 r0 top
P61 "Header 2" HDR1X2 154.625,19.198 r0 top
P62 "Header 2" HDR1X2 172.468,19.064 r0 top
P63 "Header 2" HDR1X2 181.35,18.832 r0 top
P64 "Header 2" HDR1X2 200.134,18.872 r0 top
P65 "Header 2" HDR1X2 190.583,18.785 r0 top
P66 "Header 2" HDR1X2 208.747,18.706 r0 top
P67 "Header 2" HDR1X2 217.94,18.791 r0 top
P68 "Header 2" HDR1X2 226.704,18.612 r0 top
P69 "Header 2" HDR1X2 236.015,18.597 r0 top
P70 "Header 4X2" HDR2X4 342.217,149.874 r90 top
P71 "Header 3" HDR1X3 311.555,140.269 r90 top
P72 "Header 3" HDR1X3 304.493,109.126 r90 top
P73 "Header 3" HDR1X3 304.594,93.175 r90 top
P74 "Header 3" HDR1X3 328.124,92.841 r90 top
P75 "Header 3" HDR1X3 328.058,108.791 r90 top
P76 "Header 3" HDR1X3 276.521,219.75 r270 top
P77 "Header 3" HDR1X3 317.517,199.051 r90 top
P78 "Header 3" HDR1X3 313.762,199.062 r90 top
P79 "Header 3" HDR1X3 309.93,198.939 r90 top
P80 "Header 2" HDR1X2 318.599,52.058 r90 top
P81 "Header 2" HDR1X2 306.568,20.257 r90 top
P82 "Header 2" HDR1X2 318.148,13.786 r90 top
P83 "Header 2" HDR1X2 331.438,199.171 r270 top
P84 "Header 2" HDR1X2 302.23,197.941 r270 top
P85 "Header 3" HDR1X3 288.052,217.946 r90 top
P86 "Header 2" HDR1X2 323.422,204.708 r90 top
P87 "Header 2" HDR1X2 295.048,203.096 r90 top
P88 "Header 2" HDR1X2 321.239,2.409 r90 top
P89 "Header 3" HDR1X3 88.193,117.712 r0 top
R1 "RMCF0603ZT0R00" STA_RMCF0603_STP 128.014,199.368 r270 top
R2 "RMCF0603ZT0R00" STA_RMCF0603_STP 123.265,199.316 r270 top
R3 "RMCF0603ZT0R00" STA_RMCF0603_STP 77.875,215.31 r90 top
R4 "ERA6AEB1021V" RES_ERA6A_0805_PAN 128.112,216.484 r270 top value=1.02k
R5 "ERA-6AEB102V" RC0805N_PAN 122.973,216.559 r90 top value=1k
R6 "ERA-6AEB102V" RC0805N_PAN 117.255,210.464 r270 top value=1k
R7 "ERA-6AEB102V" RC0805N_PAN 133.975,210.534 r270 top value=1k
R8 "ERA6AEB52R3V" RES_ERA6A_0805_PAN 123.843,219.799 r0 top value=52.3
R9 "RMCF0603ZT0R00" STA_RMCF0603_STP 160.891,208.963 r270 top
R10 "RMCF0603ZT0R00" STA_RMCF0603_STP 162.987,209.035 r270 top
R11 "RMCF0603ZT0R00" STA_RMCF0603_STP 77.897,194.795 r270 top
R12 "RMCF0603ZT0R00" STA_RMCF0603_STP 189.786,208.94 r270 top
R13 "RMCF0603ZT0R00" STA_RMCF0603_STP 192.039,209.088 r270 top
R14 "RMCF0603ZT0R00" STA_RMCF0603_STP 163.453,187.342 r90 top
R15 "RCL06120000Z0EA" RCL0612_VIS 36.533,159.187 r270 top
R16 "RCL06120000Z0EA" RCL0612_VIS 27.307,159.085 r270 top
R17 "RCL06120000Z0EA" RCL0612_VIS 32.223,159.087 r270 top
R18 "RCL06120000Z0EA" RCL0612_VIS 30.572,174.43 r90 top
R19 "RMCF0603ZT0R00" STA_RMCF0603_STP 78.124,182.032 r90 top
R20 "RCL06120000Z0EA" RCL0612_VIS 40.936,159.287 r270 top
R21 "RMCF0603ZT0R00" STA_RMCF0603_STP 163.546,167.708 r270 top
R22 "RMCF0603ZT0R00" STA_RMCF0603_STP 78.109,161.807 r270 top
R23 "RMCF0603ZT0R00" STA_RMCF0603_STP 79.052,147.653 r90 top
R24 "RMCF0603ZT0R00" STA_RMCF0603_STP 78.854,127.52 r270 top
R25 "ERA6AEB2432V" RES_ERA6A_0805_PAN 159.02,113.923 r180 top
R26 "ERA6AEB2433V" RES_ERA6A_0805_PAN 159.291,97.794 r180 top
R27 "Thick Film" RESC1608N 151.6,133.623 r270 top value=10K
R28 "ERA6AEB2433V" RES_ERA6A_0805_PAN 182.821,97.461 r180 top
R29 "ERA6AEB2433V" RES_ERA6A_0805_PAN 182.63,113.533 r180 top
R30 "ERA6AEB2432V" RES_ERA6A_0805_PAN 299.381,113.722 r180 top
R31 "ERA6AEB2433V" RES_ERA6A_0805_PAN 299.652,97.593 r180 top
R32 "Thick Film" RESC1608N 291.96,133.422 r270 top value=10K
R33 "ERA6AEB2433V" RES_ERA6A_0805_PAN 323.182,97.26 r180 top
R34 "ERA6AEB2433V" RES_ERA6A_0805_PAN 322.991,113.332 r180 top
R35 "RMCF0603ZT0R00" STA_RMCF0603_STP 268.286,199.289 r270 top
R36 "RMCF0603ZT0R00" STA_RMCF0603_STP 263.537,199.237 r270 top
R37 "ERA6AEB1021V" RES_ERA6A_0805_PAN 268.385,216.405 r270 top
R38 "ERA-6AEB102V" RC0805N_PAN 263.246,216.48 r90 top
R39 "ERA-6AEB102V" RC0805N_PAN 257.527,210.385 r270 top
R40 "ERA-6AEB102V" RC0805N_PAN 274.247,210.455 r270 top
R41 "ERA6AEB52R3V" RES_ERA6A_0805_PAN 264.116,219.721 r0 top
R42 "RMCF0603ZT0R00" STA_RMCF0603_STP 301.163,208.884 r270 top
R43 "RMCF0603ZT0R00" STA_RMCF0603_STP 303.26,208.956 r270 top
R44 "RMCF0603ZT0R00" STA_RMCF0603_STP 330.059,208.861 r270 top
R45 "RMCF0603ZT0R00" STA_RMCF0603_STP 332.311,209.009 r270 top
R46 "ERJ-3EKF1002V" RC0603N_PAN 70.423,214.504 r0 bottom
R47 "ERJ-3EKF1002V" RC0603N_PAN 70.339,216.294 r0 bottom
R48 "ERJ-3EKF1002V" RC0603N_PAN 70.563,187.789 r0 bottom
R49 "ERJ-3EKF1002V" RC0603N_PAN 70.436,189.499 r0 bottom
R50 "ERJ-3EKF1002V" RC0603N_PAN 70.393,181.205 r0 bottom
R51 "ERJ-3EKF1002V" RC0603N_PAN 70.406,182.916 r0 bottom
R52 "ERJ-3EKF1002V" RC0603N_PAN 69.264,157.446 r270 bottom
R53 "ERJ-3EKF1002V" RC0603N_PAN 71.319,157.401 r270 bottom
R54 "ERJ-3EKF1002V" RC0603N_PAN 70.132,148.422 r270 bottom
R55 "ERJ-3EKF1002V" RC0603N_PAN 71.847,148.446 r270 bottom
R56 "ERJ-3EKF1002V" RC0603N_PAN 69.806,124.312 r270 bottom
R57 "ERJ-3EKF1002V" RC0603N_PAN 71.597,124.318 r270 bottom
R58 "ERJ-3EKF1002V" RC0603N_PAN 173.829,190.11 r90 bottom
R59 "ERJ-3EKF1002V" RC0603N_PAN 171.478,190.101 r90 bottom
R60 "ERJ-3EKF1002V" RC0603N_PAN 174.167,166.111 r90 bottom
R61 "ERJ-3EKF1002V" RC0603N_PAN 172.175,166.11 r90 bottom
R62 "ERJ-3EKF1002V" RC0603N_PAN 72.904,167.338 r270 bottom
R63 "ERJ-3EKF1002V" RC0603N_PAN 75.211,167.381 r270 bottom
R64 "ERJ-3EKF1002V" RC0603N_PAN 82.698,171.945 r0 bottom
R65 "ERJ-3EKF1002V" RC0603N_PAN 82.695,174.079 r0 bottom
R66 "RNCF0603TKY10K0" STA_RNCF0603_STP 214.171,150.521 r90 bottom
R67 "RNCF0603TKY2K00" RES_RNCF0603_STP 214.196,147.01 r90 bottom
R68 "RNCF0603TKY10K0" STA_RNCF0603_STP 214.199,143.256 r90 bottom
R69 "RMCF0603ZT0R00" STA_RMCF0603_STP 248.632,203.887 r90 bottom value=0
R70 "RH73X2A50GNTN" RES_RH732A_TYC 246.089,204.091 r270 bottom value=50G
R71 "RH73X2A50GNTN" RES_RH732A_TYC 246.173,200.16 r90 bottom value=50G
R72 "RMCF0603ZT0R00" STA_RMCF0603_STP 248.601,200.327 r270 bottom value=0
R73 "RMCF0603ZT0R00" STA_RMCF0603_STP 247.001,169.24 r90 bottom value=0
R74 "RH73X2A50GNTN" RES_RH732A_TYC 244.458,169.444 r270 bottom value=50G
R75 "RH73X2A50GNTN" RES_RH732A_TYC 244.542,165.513 r90 bottom value=50G
R76 "RMCF0603ZT0R00" STA_RMCF0603_STP 246.97,165.68 r270 bottom value=0
R77 "RMCF0603ZT0R00" STA_RMCF0603_STP 245.884,135.854 r90 bottom value=0
R78 "RH73X2A50GNTN" RES_RH732A_TYC 243.341,136.057 r270 bottom value=50G
R79 "RH73X2A50GNTN" RES_RH732A_TYC 243.425,132.126 r90 bottom value=50G
R80 "RMCF0603ZT0R00" STA_RMCF0603_STP 245.853,132.293 r270 bottom value=0
R81 "RMCF0603ZT0R00" STA_RMCF0603_STP 288.562,172.33 r90 bottom value=0
R82 "RH73X2A50GNTN" RES_RH732A_TYC 290.99,172.497 r270 bottom value=50G
R83 "RH73X2A50GNTN" RES_RH732A_TYC 291.074,168.566 r90 bottom value=50G
R84 "RMCF0603ZT0R00" STA_RMCF0603_STP 288.531,168.769 r270 bottom value=0
R85 "Thick Film" RESC1608N 45.163,220.997 r0 top value=866R
U1 "NCD2400MTR" DFN-6_IXY 73.062,218.377 r180 top
U2 "NCD2400MTR" DFN-6_IXY 77.891,209.962 r270 top
U3 "THS4521IDR" D8 125.532,210.386 r0 top
U4 "NCD2400MTR" DFN-6_IXY 73.249,191.718 r180 top
U5 "NCD2400MTR" DFN-6_IXY 168.478,190.55 r0 top
U6 "PGA855RGTR" VQFN16_RGT_TEX 161.833,215.475 r90 top
U7 "PGA855RGTR" VQFN16_RGT_TEX 190.752,215.531 r90 top
U8 "NCD2400MTR" DFN-6_IXY 77.922,200.124 r90 top
U9 "NCD2400MTR" DFN-6_IXY 163.468,181.995 r270 top
U10 "NCD2400MTR" DFN-6_IXY 73.311,185.099 r180 top
U11 "NCD2400MTR" DFN-6_IXY 169.123,164.474 r0 top
U12 "NCD2400MTR" DFN-6_IXY 78.14,176.684 r270 top
U13 "NCD2400MTR" DFN-6_IXY 163.57,173.037 r90 top
U14 "NCD2400MTR" DFN-6_IXY 73.82,158.73 r180 top
U15 "NCD2400MTR" DFN-6_IXY 78.133,167.136 r90 top
U16 "DAC7614EB" DB20 184.621,150.061 r0 top
U17 "NCD2400MTR" DFN-6_IXY 74.239,150.72 r180 top
U18 "NCD2400MTR" DFN-6_IXY 79.067,142.306 r270 top
U19 "ISL60002BIH325Z-T7A" P3_064_INR 160.838,128.835 r0 top
U20 "DAC7614EB" DB20 184.727,132.276 r0 top
U21 "NCD2400MTR" DFN-6_IXY 74.565,124.443 r180 top
U22 "NCD2400MTR" DFN-6_IXY 78.878,132.849 r90 top
U23 "SN74AUP1T17DCKR" DCK5 155.631,25.071 r0 top
U24 "TLV2771CDBVR" DBV5 150.304,110.43 r0 top
U25 "BC807-25WT1G" SOT-323-3_2P2X1P35_ONS 159.089,110.104 r270 top
U26 "DEV-16771" MODULE_DEV-16771 92.116,18.27 r0 bottom locked
U27 "TLV2771CDBVR" DBV5 150.406,94.479 r0 top
U28 "BC807-25WT1G" SOT-323-3_2P2X1P35_ONS 159.19,94.153 r270 top
U29 "LP3961ES-2.5" TS5B_TEX 154.982,149.338 r0 top
U30 "TLV2771CDBVR" DBV5 174.303,94.069 r0 top
U31 "BC807-25WT1G" SOT-323-3_2P2X1P35_ONS 182.72,93.819 r270 top
U32 "TLV2771CDBVR" DBV5 174.238,110.019 r0 top
U33 "BC807-25WT1G" SOT-323-3_2P2X1P35_ONS 182.655,109.769 r270 top
U34 "SN74AUP1T17DCKR" DCK5 164.587,25.138 r0 top
U35 "SN74AUP1T17DCKR" DCK5 173.64,25.084 r0 top
U36 "SN74AUP1T17DCKR" DCK5 182.7,25.133 r0 top
U37 "SN74AUP1T17DCKR" DCK5 201.442,25.178 r0 top
U38 "SN74AUP1T17DCKR" DCK5 192.069,25.133 r0 top
U39 "SN74AUP1T17DCKR" DCK5 210.403,25.173 r0 top
U40 "SN74AUP1T17DCKR" DCK5 219.572,25.183 r0 top
U41 "SN74AUP1T17DCKR" DCK5 228.42,25.122 r0 top
U42 "SN74AUP1T17DCKR" DCK5 237.349,25.093 r0 top
U43 "DAC7614EB" DB20 324.981,149.86 r0 top
U44 "ISL60002BIH325Z-T7A" P3_064_INR 301.199,128.634 r0 top
U45 "DAC7614EB" DB20 325.087,132.075 r0 top
U46 "TLV2771CDBVR" DBV5 290.665,110.229 r0 top
U47 "BC807-25WT1G" SOT-323-3_2P2X1P35_ONS 299.45,109.903 r270 top
U48 "TLV2771CDBVR" DBV5 290.766,94.278 r0 top
U49 "BC807-25WT1G" SOT-323-3_2P2X1P35_ONS 299.551,93.952 r270 top
U50 "LP3961ES-2.5" TS5B_TEX 295.343,149.137 r0 top
U51 "TLV2771CDBVR" DBV5 314.664,93.868 r0 top
U52 "BC807-25WT1G" SOT-323-3_2P2X1P35_ONS 323.081,93.618 r270 top
U53 "TLV2771CDBVR" DBV5 314.598,109.818 r0 top
U54 "BC807-25WT1G" SOT-323-3_2P2X1P35_ONS 323.015,109.568 r270 top
U55 "THS4521IDR" D8 265.805,210.307 r0 top
U56 "PGA855RGTR" VQFN16_RGT_TEX 302.106,215.396 r90 top
U57 "PGA855RGTR" VQFN16_RGT_TEX 331.024,215.452 r90 top
VDD_1 "Red" LED-0603-RED 40.998,221.024 r0 top

## Footprints (in the part's own frame and the unit in brackets; to place one, negate y for a bottom-side part, rotate by r counter-clockwise, add the part's x,y. Pads: shape width x height; smd on the part's side, far side on the other; paste and mask are expansions set on the pad)
CAP_0402_AVX [mm]
  rect 0.656x0.64 smd paste+0 mask+0: 1(-0.533,0) 2(0.533,0)
  body extent -0.5,-0.32 0.51,0.32, height 0.5
CAP_3216_TDK [mil]
  rect 21.78x71 smd paste+0 mask+0: 1(-69.89,0) 2(69.89,0)
  silkscreen extent -117,-40 47,41, body extent -67,-36 67,36, height 49
CAP_4532_TDK [mil]
  rect 21.78x142 smd paste+0 mask+0: 1(-99.39,0) 2(99.39,0)
  silkscreen extent -146,-76 76,76, body extent -96,-71 96,71, height 110
CAP_CML_0805_.3pF-1500pF,4700pF_STP [mil]
  rect 42x57 smd paste+0 mask+0: 1(-36.5,0) 2(36.5,0)
  silkscreen extent -3,-34 3,33, body extent -44,-29 44,29, height 30
CAPC1608N [mm]
  round 0.254 on Mech14: 0(0,0)
  rrect25% 0.9x1 smd: 1(-0.85,0) 2(0.85,0)
  Top Layer pour cut-out: -0.4,0.6 0.4,0.6 0.4,-0.6 -0.4,-0.6
  silkscreen extent -0.18,-0.48 0.18,0.48, body extent -0.85,-0.45 0.85,0.45, height 0.89
CAPC17595_87N_KEM [mm]
  rect 1.006x0.95 smd paste+0 mask+0: 1(-0.728,0) 2(0.728,0)
  body extent -0.87,-0.48 0.87,0.48, height 0.87
CAPMP2012X150USR [mm]
  round 0.254 on Mech14: 0(0,0)
  rrect25% 1.35x1.2 smd: 1(-0.95,0) 2(0.95,0)
  Top Layer pour cut-out: -0.4,0.8 0.4,0.8 0.4,-0.8 -0.4,-0.8
  silkscreen extent -1,-1.2 0.6,1.2, body extent -1.02,-0.67 1.03,0.68, height 1.5
CONN1_FCR7350R_CLF [mil]
  round 107 hole 87 mask+0: 1(0,0)
  round 67 hole 47: 2(-200,149.61) 3(200,149.61) 4(-200,-250.39) 5(200,-250.39)
  silkscreen extent -281,-1087 241,222, body extent 0,0 10,10, height 10
CONN5_VB335_CIN [mm]
  round 1.6 hole 1.1 paste-0.749 mask+0: 1(0,0)
  round 1.905 / inner round 1.524 / far side round 1.905 hole 1.397 paste-0.953 mask+0: 2(-3.125,3.125) 3(-3.125,-3.125) 4(3.125,-3.125) 5(3.125,3.125)
  silkscreen extent -5.63,-5.63 5.63,5.63
CONN_90120-0761_MOL [mil]
  round 63 hole 43 mask+0: 1(0,0)
  silkscreen extent -140,-55 55,55, body extent 0,0 10,10, height 10
CONN_CONBN_LNX [mil]
  round 55 / inner round 60 / far side round 55 hole 35 paste-27.5 mask+0: 1(-100,-293.5) 2(0,-293.5)
  round 79 / inner round 60 / far side round 79 hole 79 unplated paste-39.5 mask-39.5: 3(-200,-93.5) 5(200,-93.5)
  silkscreen extent -295,-298 295,1098
D8 [mil]
  rect 78x22 smd paste-39 mask-39: 1(-97,75) 2(-97,25) 3(-97,-25) 4(-97,-75) 5(97,-75) 6(97,-25) 7(97,25) 8(97,75)
  silkscreen extent -54,-98 54,99, body extent -122,-99 122,99, height 69
DB20 [mil]
  rect 64.56x16.97 smd paste+0 mask+0: 1(-143,115.16) 2(-143,89.57) 3(-143,63.98) 4(-143,38.39) 5(-143,12.79) 6(-143,-12.8) 7(-143,-38.39) 8(-143,-63.98) 9(-143,-89.57) 10(-143,-115.16) 11(143,-115.16) 12(143,-89.57) 13(143,-63.98) 14(143,-38.39) 15(143,-12.8) 16(143,12.79) 17(143,38.39) 18(143,63.98) 19(143,89.57) 20(143,115.16)
  silkscreen extent -195,-152 195,153, body extent -161,-147 161,147, height 79
DBV5 [mil]
  rect 38.28x20 smd paste+0 mask+0: 1(-53.64,37.4) 2(-53.64,0) 3(-53.64,-37.4) 4(53.64,-37.4) 5(53.64,37.4)
  silkscreen extent -40,-65 40,65, body extent -59,-60 59,60, height 57
DCK5 [mil]
  rect 46x14 smd paste-23 mask-23: 1(-41,25.59) 2(-41,0) 3(-41,-25.59) 4(41,-25.59) 5(41,25.59)
  silkscreen extent -9,-42 27,43, body extent -47,-43 47,43, height 43
DFN-6_IXY [mil]
  rect 24x12 smd paste+0 mask+0: 1(-40.5,25.59) 2(-40.5,0) 3(-40.5,-25.59) 4(40.5,-25.59) 5(40.5,0) 6(40.5,25.59)
  rect 41x65 smd paste+0 mask+0: 7(0,0)
  silkscreen extent -84,-46 46,45, body extent -41,-41 41,41, height 32
HARWIN_S1711-46R [mm]
  rect 9.4x2.28 smd: 1(0,0)
  silkscreen extent -4.39,-1.46 4.39,1.46
HDR1X2 [mm] "Connector; Header; 2 Position"
  rect 1.5x1.5 hole 0.9: 1(0,0)
  round 1.5 hole 0.9: 2(2.54,0)
  silkscreen extent -1.27,-1.27 3.81,1.27
HDR1X3 [mm] "Connector; Header; 3 Position"
  rect 1.5x1.5 hole 0.9: 1(0,0)
  round 1.5 hole 0.9: 2(2.54,0) 3(5.08,0)
  silkscreen extent -1.27,-1.27 6.35,1.27
HDR2X4 [mm] "Connector; Header; 4x2 Position"
  rect 1.5x1.5 hole 0.9: 1(0,0)
  round 1.5 hole 0.9: 2(0,2.54) 3(2.54,0) 4(2.54,2.54) 5(5.08,0) 6(5.08,2.54) 7(7.62,0) 8(7.62,2.54)
  silkscreen extent -1.27,-1.27 8.89,3.81
HDRV96W64P254_3X32_8128X749X838P [mm]
  rect 1.65x1.65 / inner round 1.65 / far side rect 1.65x1.65 hole 1.1: 1(0,0)
  round 1.65 hole 1.1: 2(0,2.54) 3(0,5.08) 4(2.54,0) 5(2.54,2.54) 6(2.54,5.08) 7(5.08,0) 8(5.08,2.54) 9(5.08,5.08) 10(7.62,0) 11(7.62,2.54) 12(7.62,5.08) 13(10.16,0) 14(10.16,2.54) 15(10.16,5.08) 16(12.7,0) 17(12.7,2.54) 18(12.7,5.08) 19(15.24,0) 20(15.24,2.54) 21(15.24,5.08) 22(17.78,0) 23(17.78,2.54) 24(17.78,5.08) 25(20.32,0) 26(20.32,2.54) 27(20.32,5.08) 28(22.86,0) 29(22.86,2.54) 30(22.86,5.08) 31(25.4,0) 32(25.4,2.54) 33(25.4,5.08) 34(27.94,0) 35(27.94,2.54) 36(27.94,5.08) 37(30.48,0) 38(30.48,2.54) 39(30.48,5.08) 40(33.02,0) 41(33.02,2.54) 42(33.02,5.08) 43(35.56,0) 44(35.56,2.54) 45(35.56,5.08) 46(38.1,0) 47(38.1,2.54) 48(38.1,5.08) 49(40.64,0) 50(40.64,2.54) 51(40.64,5.08) 52(43.18,0) 53(43.18,2.54) 54(43.18,5.08) 55(45.72,0) 56(45.72,2.54) 57(45.72,5.08) 58(48.26,0) 59(48.26,2.54) 60(48.26,5.08) 61(50.8,0) 62(50.8,2.54) 63(50.8,5.08) 64(53.34,0) 65(53.34,2.54) 66(53.34,5.08) 67(55.88,0) 68(55.88,2.54) 69(55.88,5.08) 70(58.42,0) 71(58.42,2.54) 72(58.42,5.08) 73(60.96,0) 74(60.96,2.54) 75(60.96,5.08) 76(63.5,0) 77(63.5,2.54) 78(63.5,5.08) 79(66.04,0) 80(66.04,2.54) 81(66.04,5.08) 82(68.58,0) 83(68.58,2.54) 84(68.58,5.08) 85(71.12,0) 86(71.12,2.54) 87(71.12,5.08) 88(73.66,0) 89(73.66,2.54) 90(73.66,5.08) 91(76.2,0) 92(76.2,2.54) 93(76.2,5.08) 94(78.74,0) 95(78.74,2.54) 96(78.74,5.08)
  silkscreen extent -1.27,-1.2 80.01,6.28
HRS_DF17(4.0)-40DP-0.5V(57) [mm]
  rect 0.25x1.15 smd: 1(-4.75,-2.575) 2(-4.75,2.575) 3(-4.25,-2.575) 4(-4.25,2.575) 5(-3.75,-2.575) 6(-3.75,2.575) 7(-3.25,-2.575) 8(-3.25,2.575) 9(-2.75,-2.575) 10(-2.75,2.575) 11(-2.25,-2.575) 12(-2.25,2.575) 13(-1.75,-2.575) 14(-1.75,2.575) 15(-1.25,-2.575) 16(-1.25,2.575) 17(-0.75,-2.575) 18(-0.75,2.575) 19(-0.25,-2.575) 20(-0.25,2.575) 21(0.25,-2.575) 22(0.25,2.575) 23(0.75,-2.575) 24(0.75,2.575) 25(1.25,-2.575) 26(1.25,2.575) 27(1.75,-2.575) 28(1.75,2.575) 29(2.25,-2.575) 30(2.25,2.575) 31(2.75,-2.575) 32(2.75,2.575) 33(3.25,-2.575) 34(3.25,2.575) 35(3.75,-2.575) 36(3.75,2.575) 37(4.25,-2.575) 38(4.25,2.575) 39(4.75,-2.575) 40(4.75,2.575)
  rect 1.4x2.1 smd: S1(-7,0) S2(7,0)
  round 0.6 hole 0.6 unplated: ""(-6,-1.9) ""(6,-1.9)
  Keep-Out Layer region: 6.3,-2.002 -6.305,-2.002 -6.305,2 6.3,2
  silkscreen extent -7.5,-3.25 7.5,2.35
LED-0603-RED [mm]
  round 0.254 on Mech14: 0(0,0)
  rrect25% 0.8x0.8 smd: A(-0.85,0) K(0.85,0)
  Top Layer pour cut-out: -0.5,0.5 0.5,0.5 0.5,-0.5 -0.5,-0.5
  silkscreen extent -1.55,-0.67 1.68,0.67, body extent -0.8,-0.4 0.8,0.4, height 0.75
MODULE_DEV-16771 [mm]
  round 1.308 hole 0.8: 0(-26.67,-7.62) 1(-24.13,-7.62) 2(-21.59,-7.62) 3(-19.05,-7.62) 3.3V_1(6.35,-7.62) 3.3V_2(-24.13,7.62) 3.3V_3(16.51,-2.54) 4(-16.51,-7.62) 5(-13.97,-7.62) 6(-11.43,-7.62) 7(-8.89,-7.62) 8(-6.35,-7.62) 9(-3.81,-7.62) 10(-1.27,-7.62) 11(1.27,-7.62) 12(3.81,-7.62) 13(3.81,7.62) 14(1.27,7.62) 15(-1.27,7.62) 16(-3.81,7.62) 17(-6.35,7.62) 18(-8.89,7.62) 19(-11.43,7.62) 20(-13.97,7.62) 21(-16.51,7.62) 22(-19.05,7.62) 23(-21.59,7.62) 24(8.89,-7.62) 25(11.43,-7.62) 26(13.97,-7.62) 27(16.51,-7.62) 28(19.05,-7.62) 29(21.59,-7.62) 30(24.13,-7.62) 31(26.67,-7.62) 32(29.21,-7.62) 33(29.21,7.62) 34(26.67,7.62) 35(24.13,7.62) 36(21.59,7.62) 37(19.05,7.62) 38(16.51,7.62) 39(13.97,7.62) 40(11.43,7.62) 41(8.89,7.62) GND1(-29.21,-7.62) GND2(6.35,7.62) GND3(-26.67,7.62) GND4(16.51,0) ON/OFF(16.51,5.08) PROGRAM(16.51,2.54) VBAT(16.51,-5.08) VIN(-29.21,7.62) VUSB(-26.67,5.08)
  round 1.258 hole 0.75: 5V(-22.86,-4.57) D+(-17.78,-4.57) D-(-20.32,-4.57) USB_GND1(-15.24,-4.57) USB_GND2(-12.7,-4.57)
  round 1.208 hole 0.7: GND5(-14.24,3.17) LED(-16.24,3.17) R+(-16.24,5.17) R-(-14.24,5.17) T+(-14.24,1.17) T-(-16.24,1.17)
  silkscreen extent -31.18,-9.6 30.48,8.89, body extent -31.18,-8.89 30.48,8.89, height 7.15
P3_064_INR [mil]
  rect 22x47 smd paste+0 mask+0: 1(-37.4,-42.5) 2(37.4,-42.5) 3(0,42.5)
  silkscreen extent -115,-57 65,32, body extent -60,-52 60,52, height 44
RC0603N_PAN [mm]
  rect 0.756x0.8 smd paste+0 mask+0: 1(-0.778,0) 2(0.778,0)
  silkscreen extent -0.09,-0.53 0.09,0.53, body extent -0.8,-0.4 0.8,0.4, height 0.71
RC0805N_PAN [mm]
  rect 1.006x1.2 smd paste+0 mask+0: 1(-0.853,0) 2(0.853,0)
  body extent -1,-0.6 1,0.6, height 0.71
RCL0612_VIS [mm]
  rect 0.703x3.4 smd paste+0 mask+0: 1(-0.752,0) 2(0.752,0)
  body extent -0.9,-1.7 0.9,1.7, height 0.65
RES_ERA6A_0805_PAN [mil]
  rect 34x53 smd paste+0 mask+0: 1(-34.5,0) 2(34.5,0)
  silkscreen extent -5,-31 5,32, body extent -44,-26 44,26, height 24
RES_RH732A_TYC [mil]
  rect 28x55 smd paste+0 mask+0: 1(-36.5,0) 2(36.5,0)
  silkscreen extent -10,-32 10,32, body extent -43,-27 43,27, height 20
RES_RNCF0603_STP [mil]
  rect 34x35 smd paste+0 mask+0: 1(-29.5,0) 2(29.5,0)
  body extent -33,-17 33,17, height 22
RESC1608N [mm]
  round 0.254 on Mech14: 0(0,0)
  rrect25% 0.9x1 smd: 1(-0.85,0) 2(0.85,0)
  Top Layer pour cut-out: -0.4,0.6 0.4,0.6 0.4,-0.6 -0.4,-0.6
  silkscreen extent -0.15,-0.41 0.15,0.41, body extent -0.87,-0.47 0.88,0.48, height 0.54
SAMTEC_ASP-127797-01 [mm]
  round 0.64 smd paste+0.125: C01(24.765,3.175) C02(23.495,3.175) C03(22.225,3.175) C04(20.955,3.175) C05(19.685,3.175) C06(18.415,3.175) C07(17.145,3.175) C08(15.875,3.175) C09(14.605,3.175) C10(13.335,3.175) C11(12.065,3.175) C12(10.795,3.175) C13(9.525,3.175) C14(8.255,3.175) C15(6.985,3.175) C16(5.715,3.175) C17(4.445,3.175) C18(3.175,3.175) C19(1.905,3.175) C20(0.635,3.175) C21(-0.635,3.175) C22(-1.905,3.175) C23(-3.175,3.175) C24(-4.445,3.175) C25(-5.715,3.175) C26(-6.985,3.175) C27(-8.255,3.175) C28(-9.525,3.175) C29(-10.795,3.175) C30(-12.065,3.175) C31(-13.335,3.175) C32(-14.605,3.175) C33(-15.875,3.175) C34(-17.145,3.175) C35(-18.415,3.175) C36(-19.685,3.175) C37(-20.955,3.175) C38(-22.225,3.175) C39(-23.495,3.175) C40(-24.765,3.175) D01(24.765,1.905) D02(23.495,1.905) D03(22.225,1.905) D04(20.955,1.905) D05(19.685,1.905) D06(18.415,1.905) D07(17.145,1.905) D08(15.875,1.905) D09(14.605,1.905) D10(13.335,1.905) D11(12.065,1.905) D12(10.795,1.905) D13(9.525,1.905) D14(8.255,1.905) D15(6.985,1.905) D16(5.715,1.905) D17(4.445,1.905) D18(3.175,1.905) D19(1.905,1.905) D20(0.635,1.905) D21(-0.635,1.905) D22(-1.905,1.905) D23(-3.175,1.905) D24(-4.445,1.905) D25(-5.715,1.905) D26(-6.985,1.905) D27(-8.255,1.905) D28(-9.525,1.905) D29(-10.795,1.905) D30(-12.065,1.905) D31(-13.335,1.905) D32(-14.605,1.905) D33(-15.875,1.905) D34(-17.145,1.905) D35(-18.415,1.905) D36(-19.685,1.905) D37(-20.955,1.905) D38(-22.225,1.905) D39(-23.495,1.905) D40(-24.765,1.905) G01(24.765,-1.905) G02(23.495,-1.905) G03(22.225,-1.905) G04(20.955,-1.905) G05(19.685,-1.905) G06(18.415,-1.905) G07(17.145,-1.905) G08(15.875,-1.905) G09(14.605,-1.905) G10(13.335,-1.905) G11(12.065,-1.905) G12(10.795,-1.905) G13(9.525,-1.905) G14(8.255,-1.905) G15(6.985,-1.905) G16(5.715,-1.905) G17(4.445,-1.905) G18(3.175,-1.905) G19(1.905,-1.905) G20(0.635,-1.905) G21(-0.635,-1.905) G22(-1.905,-1.905) G23(-3.175,-1.905) G24(-4.445,-1.905) G25(-5.715,-1.905) G26(-6.985,-1.905) G27(-8.255,-1.905) G28(-9.525,-1.905) G29(-10.795,-1.905) G30(-12.065,-1.905) G31(-13.335,-1.905) G32(-14.605,-1.905) G33(-15.875,-1.905) G34(-17.145,-1.905) G35(-18.415,-1.905) G36(-19.685,-1.905) G37(-20.955,-1.905) G38(-22.225,-1.905) G39(-23.495,-1.905) G40(-24.765,-1.905) H01(24.765,-3.175) H02(23.495,-3.175) H03(22.225,-3.175) H04(20.955,-3.175) H05(19.685,-3.175) H06(18.415,-3.175) H07(17.145,-3.175) H08(15.875,-3.175) H09(14.605,-3.175) H10(13.335,-3.175) H11(12.065,-3.175) H12(10.795,-3.175) H13(9.525,-3.175) H14(8.255,-3.175) H15(6.985,-3.175) H16(5.715,-3.175) H17(4.445,-3.175) H18(3.175,-3.175) H19(1.905,-3.175) H20(0.635,-3.175) H21(-0.635,-3.175) H22(-1.905,-3.175) H23(-3.175,-3.175) H24(-4.445,-3.175) H25(-5.715,-3.175) H26(-6.985,-3.175) H27(-8.255,-3.175) H28(-9.525,-3.175) H29(-10.795,-3.175) H30(-12.065,-3.175) H31(-13.335,-3.175) H32(-14.605,-3.175) H33(-15.875,-3.175) H34(-17.145,-3.175) H35(-18.415,-3.175) H36(-19.685,-3.175) H37(-20.955,-3.175) H38(-22.225,-3.175) H39(-23.495,-3.175) H40(-24.765,-3.175)
  round 1.27 hole 1.27 unplated: ""(-27.19,-3.05) ""(27.19,0)
  silkscreen extent -27.89,-7.34 28.78,7.34
SMB_V-RJ45 [mm] "Connector; SMB Straight"
  round 2.5 hole 1.5: 1(0,0) 2(-2.5,-2.5) 2(-2.5,2.5) 2(2.5,-2.5) 2(2.5,2.5)
  silkscreen extent -3.15,-3.15 3.15,3.15
SOT-323-3_2P2X1P35_ONS [mil]
  rect 18x45 smd paste+0 mask+0: 1(-27.5,-39) 2(27.5,-39) 3(0,39)
  silkscreen extent -49,-94 48,31, body extent -44,-48 44,48, height 40
STA_RMCF0603_STP [mil]
  rect 28x37 smd paste+0 mask+0: 1(-27.5,0) 2(27.5,0)
  body extent -34,-19 34,19, height 22
STA_RNCF0603_STP [mil]
  rect 28x39 smd paste+0 mask+0: 1(-29.5,0) 2(29.5,0)
  body extent -36,-19 36,19, height 22
TS5B_TEX [mil]
  rect 39.97x105.56 smd paste+0 mask+0: 1(-134,-326) 2(-67,-326) 3(0,-326) 4(67,-326) 5(134,-326)
  rect 412x428 smd paste+0 mask+0: 6(0,0)
  silkscreen extent -153,-259 153,-227, body extent -205,-278 205,200, height 189
VQFN16_RGT_TEX [mil]
  rect 32x10 smd paste+0 mask+0: 1(-57,29.54) 2(-57,9.85) 3(-57,-9.84) 4(-57,-29.53) 9(57,-29.53) 10(57,-9.84) 11(57,9.85) 12(57,29.54)
  rect 10x32 smd paste+0 mask+0: 5(-29.53,-57) 6(-9.84,-57) 7(9.85,-57) 8(29.54,-57) 13(29.54,57) 14(9.85,57) 15(-9.84,57) 16(-29.53,57)
  rect 69x69 smd paste+0 mask+0: 17(0,0)
  silkscreen extent -66,-66 93,66, body extent -61,-61 61,61, height 39

## Part data
C1 C6 C9 C11 C14 C18 C19 C23 C25 C27 C29 C31 C33 C34 C36 C38 C40 C41 C43 C45 C48 C50 C55 C57 C60 C62 C69 C70 C71 C72 C75 C76 C79 C80 C83 C84 C85 C87 C88 C90 C92 C93 C95 C98 C100 C105 C107 C110 C112 C118 C122 C126 C127 C131: library part CAPC_100n_0603, "Capacitor SMD Cer 100nF 10% 50V X7R 0603", Manufacturer 1="AVX Corporation", Manufacturer 2="TDK Corporation", Manufacturer Part Number 1=06035C104KAT2A, Manufacturer Part Number 2=C1608X7R1H104K, Package / Case="0603 (1608 Metric)", Ratings="50V; X7R", Supplier Part Number 1=478-5052-1-ND, Tolerance=±10%, ComponentLink1Description=http://www.avx.com/docs/Catalogs/cx7r.pdf, ComponentLink1URL=http://www.avx.com/docs/Catalogs/cx7r.pdf, ComponentLink2Description=http://product.tdk.com/capacitor/mlcc/en/documents/mlcc_commercial_general_en.pdf, ComponentLink2URL=http://product.tdk.com/capacitor/mlcc/en/documents/mlcc_commercial_general_en.pdf, Material=ceramic, Supplier 1=Digi-Key, Supplier 2=Digi-Key, Supplier Part Number 2=445-1314-1-ND
C2 C7 C10 C12 C15 C20 C21 C24 C26 C28 C30 C32 C35 C37 C39 C42 C44 C46 C49 C51 C56 C58 C61 C63 C65 C66 C67 C68 C73 C74 C77 C78 C81 C82 C86 C89 C91 C94 C96 C99 C101 C106 C108 C111 C113 C119 C123 C128 C129 C132 C133: library part CAPT_10u_0805_10V, "Capacitor SMD Tantalum 10uF 20% 10V 0805", Manufacturer 1="AVX Corporation", Manufacturer Part Number 1=TAJP106M010RNJ, Package / Case="0805 (2012 metric)", Ratings=10V, Supplier Part Number 1=478-3281-1-ND, Tolerance=±20%, Material=Tantalum, Supplier 1=Digi-Key
C3 C8 C115 C120: "No Description Available", Mfr_Name=Kemet
C4 C5 C13 C16 C17 C22 C116 C117 C121 C124 C125 C130 R1 R2 R3 R9 R10 R11 R12 R13 R14 R19 R21 R22 R23 R24 R35 R36 R42 R43 R44 R45 R66 R67 R68 R69 R72 R73 R76 R77 R80 R81 R84: "No Description Available", Mfr_Name="Stackpole International"
  R69 R72 R73 R76 R77 R80 R81 R84: Type=DNI
C47 C52 C59 C64 C97 C102 C109 C114: library part CAPC_47p_0603, "Capacitor SMD Cer 47pF 0603", Operating Temperature="-55°C ~ 125°C", Package / Case="0603 (1608 Metric)", Ratings="50V; NP0", Tolerance=±5%, ComponentLink1Description=http://www.avx.com/docs/Catalogs/ccog.pdf, ComponentLink1URL=http://www.avx.com/docs/Catalogs/ccog.pdf, ComponentLink2Description=http://www.tdk.com/pdf/tight_tol_B11.pdf, ComponentLink2URL=http://www.tdk.com/pdf/tight_tol_B11.pdf, ComponentLink3Description=http://www.kemet.com/datasheets&C0603C221F5GACTU, ComponentLink3URL=http://www.kemet.com/datasheets&C0603C221F5GACTU, Size / Dimension="0.063\" L x 0.031\" W (1.60mm x 0.80mm)", Thickness (Max)="0.037\" (0.95mm)"
C53 C54 C103 C104: "No Description Available", Mfr_Name=TDK, Copyright="Copyright (C) 2022 Ultra Librarian. All rights reserved.", RefDes=RefDes, Type=DEV
  C53 C103: Manufacturer_Part_Number=C3216X5R1A686M160AC
  C54 C104: Manufacturer_Part_Number=C4532X7R1C336M250KC
C134 C135 C136 C137 C138 C139 C140 C141: "No Description Available", Mfr_Name="KYOCERA AVX"
J1 J2 J3 J4 J5 J6 J7 J8 J36 J37 J38 J39 J40 J41 J42: "No Description Available", Mfr_Name="Linx Technologies", RefDes=RefDes, Type=Type
J9 J10 J11 J12 J13 J14 J15 J18 J20 J25 J26 J28 J29: "No Description Available", Mfr_Name=Cliff, Copyright="Copyright (C) 2022 Ultra Librarian. All rights reserved.", Manufacturer_Part_Number=FCR7350R, RefDes=RefDes, Type=DEV
J16 J23 J30 J32: "PC Board, Headers & Receptacles, hdr, fit, series, mount, pos, Connectors and Adapters, connector, header, Connectors...", Package=None, Availability=Unavailable, MP=DF17(4.0)-40DP-0.5V(57), Price=None
J17 J19 J21 J24: "RFI SHIELD CLIP TIN SMD", Package=None, Availability=Warning, Check_prices=https://www.snapeda.com/parts/S1711-46R/Harwin%20Inc./view-part/2172610/?ref=eda, MF="Harwin Inc.", MP=S1711-46R, Price=None, Purchase-URL=https://pricing.snapeda.com/search/part/S1711-46R/?ref=eda, SnapEDA_Link=https://www.snapeda.com/parts/S1711-46R/Harwin%20Inc./view-part/2172610/?ref=snap
J22 J27: "No Description Available", Mfr_Name="Cinch Connectivity Solutions", RefDes=RefDes, Type="Coaxial Connectors(RF) Assemblies"
J31 J35 J43: "No Description Available", Mfr_Name="Molex Connector Corporation", Copyright="Copyright (C) 2022 Ultra Librarian. All rights reserved.", Manufacturer_Part_Number=901200761, RefDes=RefDes, Type=DEV
J33: "CONN HEADER 96 POS .100\"", Manufacturer_Name=SAMTEC, Datasheet Link=http://suddendocs.samtec.com/catalog_english/tsw_th.pdf, Geometry.Height=8.38mm, Manufacturer_Part_Number=TSW-132-09-G-T
J34: "160 Position Connector Array, Male Pins Surface Mount Gold", Package=None, Availability="In Stock", Check_prices=https://www.snapeda.com/parts/ASP-127797-01/Samtec+Inc./view-part/?ref=eda, MF="Samtec Inc.", MP=ASP-127797-01, Price=None, Purchase-URL=https://pricing.snapeda.com/search?q=ASP-127797-01&ref=eda, SnapEDA_Link=https://www.snapeda.com/parts/ASP-127797-01/Samtec+Inc./view-part/?ref=snap
P1 P2 P4 P9 P10 P12 P15 P17 P19 P22 P25 P27 P30 P31 P32 P33 P35 P36 P38 P39 P40 P41 P43 P44 P46 P47 P49 P50 P51 P52 P53 P54: "SMB Straight Connector", LatestRevisionDate=17-Jul-2002, LatestRevisionNote="Re-released for DXP Platform.", Publisher="Altium Limited"
P3 P11 P13 P14 P16 P20 P21 P23 P24 P26 P29 P34 P37 P42 P45 P48 P60 P61 P62 P63 P64 P65 P66 P67 P68 P69 P80 P81 P82 P83 P84 P86 P87 P88: "Header, 2-Pin", LatestRevisionDate=17-Jul-2002, LatestRevisionNote="Re-released for DXP Platform.", Publisher="Altium Limited"
P5 P6 P7 P8 P18 P55 P56 P57 P58 P59 P71 P72 P73 P74 P75 P76 P77 P78 P79 P85 P89: "Header, 3-Pin", LatestRevisionDate=17-Jul-2002, LatestRevisionNote="Re-released for DXP Platform.", Publisher="Altium Limited"
P28 P70: "Header, 4-Pin, Dual row", LatestRevisionDate=17-Jul-2002, LatestRevisionNote="Re-released for DXP Platform.", Publisher="Altium Limited"
R4 R5 R6 R7 R8 R25 R26 R28 R29 R30 R31 R33 R34 R37 R38 R39 R40 R41 R46 R47 R48 R49 R50 R51 R52 R53 R54 R55 R56 R57 R58 R59 R60 R61 R62 R63 R64 R65: "No Description Available", Mfr_Name=Panasonic
R15 R16 R17 R18 R20: "No Description Available", Mfr_Name=Vishay
R27 R32: library part RES_10K_0603_1%, "Resistor SMD chip 10k Ohm 0.1W 1% 0603", Manufacturer 1=Yageo, Manufacturer Part Number 1=RC0603FR-0710KL, Package / Case="0603 (1608 Metric)", Ratings=1/10W, Supplier Part Number 1=311-10.0KHRCT-ND, Tolerance=±1%, Supplier 1=Digi-Key
R70 R71 R74 R75 R78 R79 R82 R83: "No Description Available", Mfr_Name="TE Connectivity"
R85: library part RES_866R_0603_1%_1, "Resistor SMD chip 866 Ohm 0.1W 1% 0603", Package / Case="0603 (1608 Metric)", Ratings=1/10W, Tolerance=±1%
U1 U2 U4 U5 U8 U9 U10 U11 U12 U13 U14 U15 U17 U18 U21 U22: "No Description Available", Mfr_Name="Littelfuse / IXYS", RefDes=RefDes, Type=Type
U3 U6 U7 U16 U20 U23 U24 U27 U29 U30 U32 U34 U35 U36 U37 U38 U39 U40 U41 U42 U43 U45 U46 U48 U50 U51 U53 U55 U56 U57: "No Description Available", Mfr_Name="Texas Instruments", RefDes=RefDes
  U3 U23 U34 U35 U36 U37 U38 U39 U40 U41 U42 U55: Type=Type
  U6 U7 U56 U57: Type=Linear
  U16 U20 U43 U45: Copyright="Copyright (C) 2022 Ultra Librarian. All rights reserved.", Manufacturer_Part_Number=DAC7614EB, Type=DEV
  U24 U27 U30 U32 U46 U48 U51 U53: Copyright="Copyright (C) 2022 Ultra Librarian. All rights reserved.", Manufacturer_Part_Number=TLV2771CDBVR, Type=DEV
  U29 U50: Copyright="Copyright (C) 2022 Ultra Librarian. All rights reserved.", Manufacturer_Part_Number=LP3961ES-2.5, Type=DEV
U19 U44: "No Description Available", Mfr_Name="Renesas / Intersil", RefDes=RefDes, Type=Type
U25 U28 U31 U33 U47 U49 U52 U54: "No Description Available", Mfr_Name=onsemi, RefDes=RefDes, Type=Type